# Altium PCB ART_CARD Rev 5.PcbDoc (part 1 of 13)
Units mil, origin at the board's own origin, x right, y up, seen from the top; angles counter-clockwise.
Board outline 6600.39 x 3903.54 mil, 8 copper layers (Top, Inner Layer 2, Inner Layer 3, Inner Layer 4, Inner Layer 5, Inner Layer 6, Inner Layer 7, Bottom), stack 63.111 mil thick; 542 components, 382 nets, 2410 pads, 1433 vias.
Unrouted connection lines stored in the file: 1247.
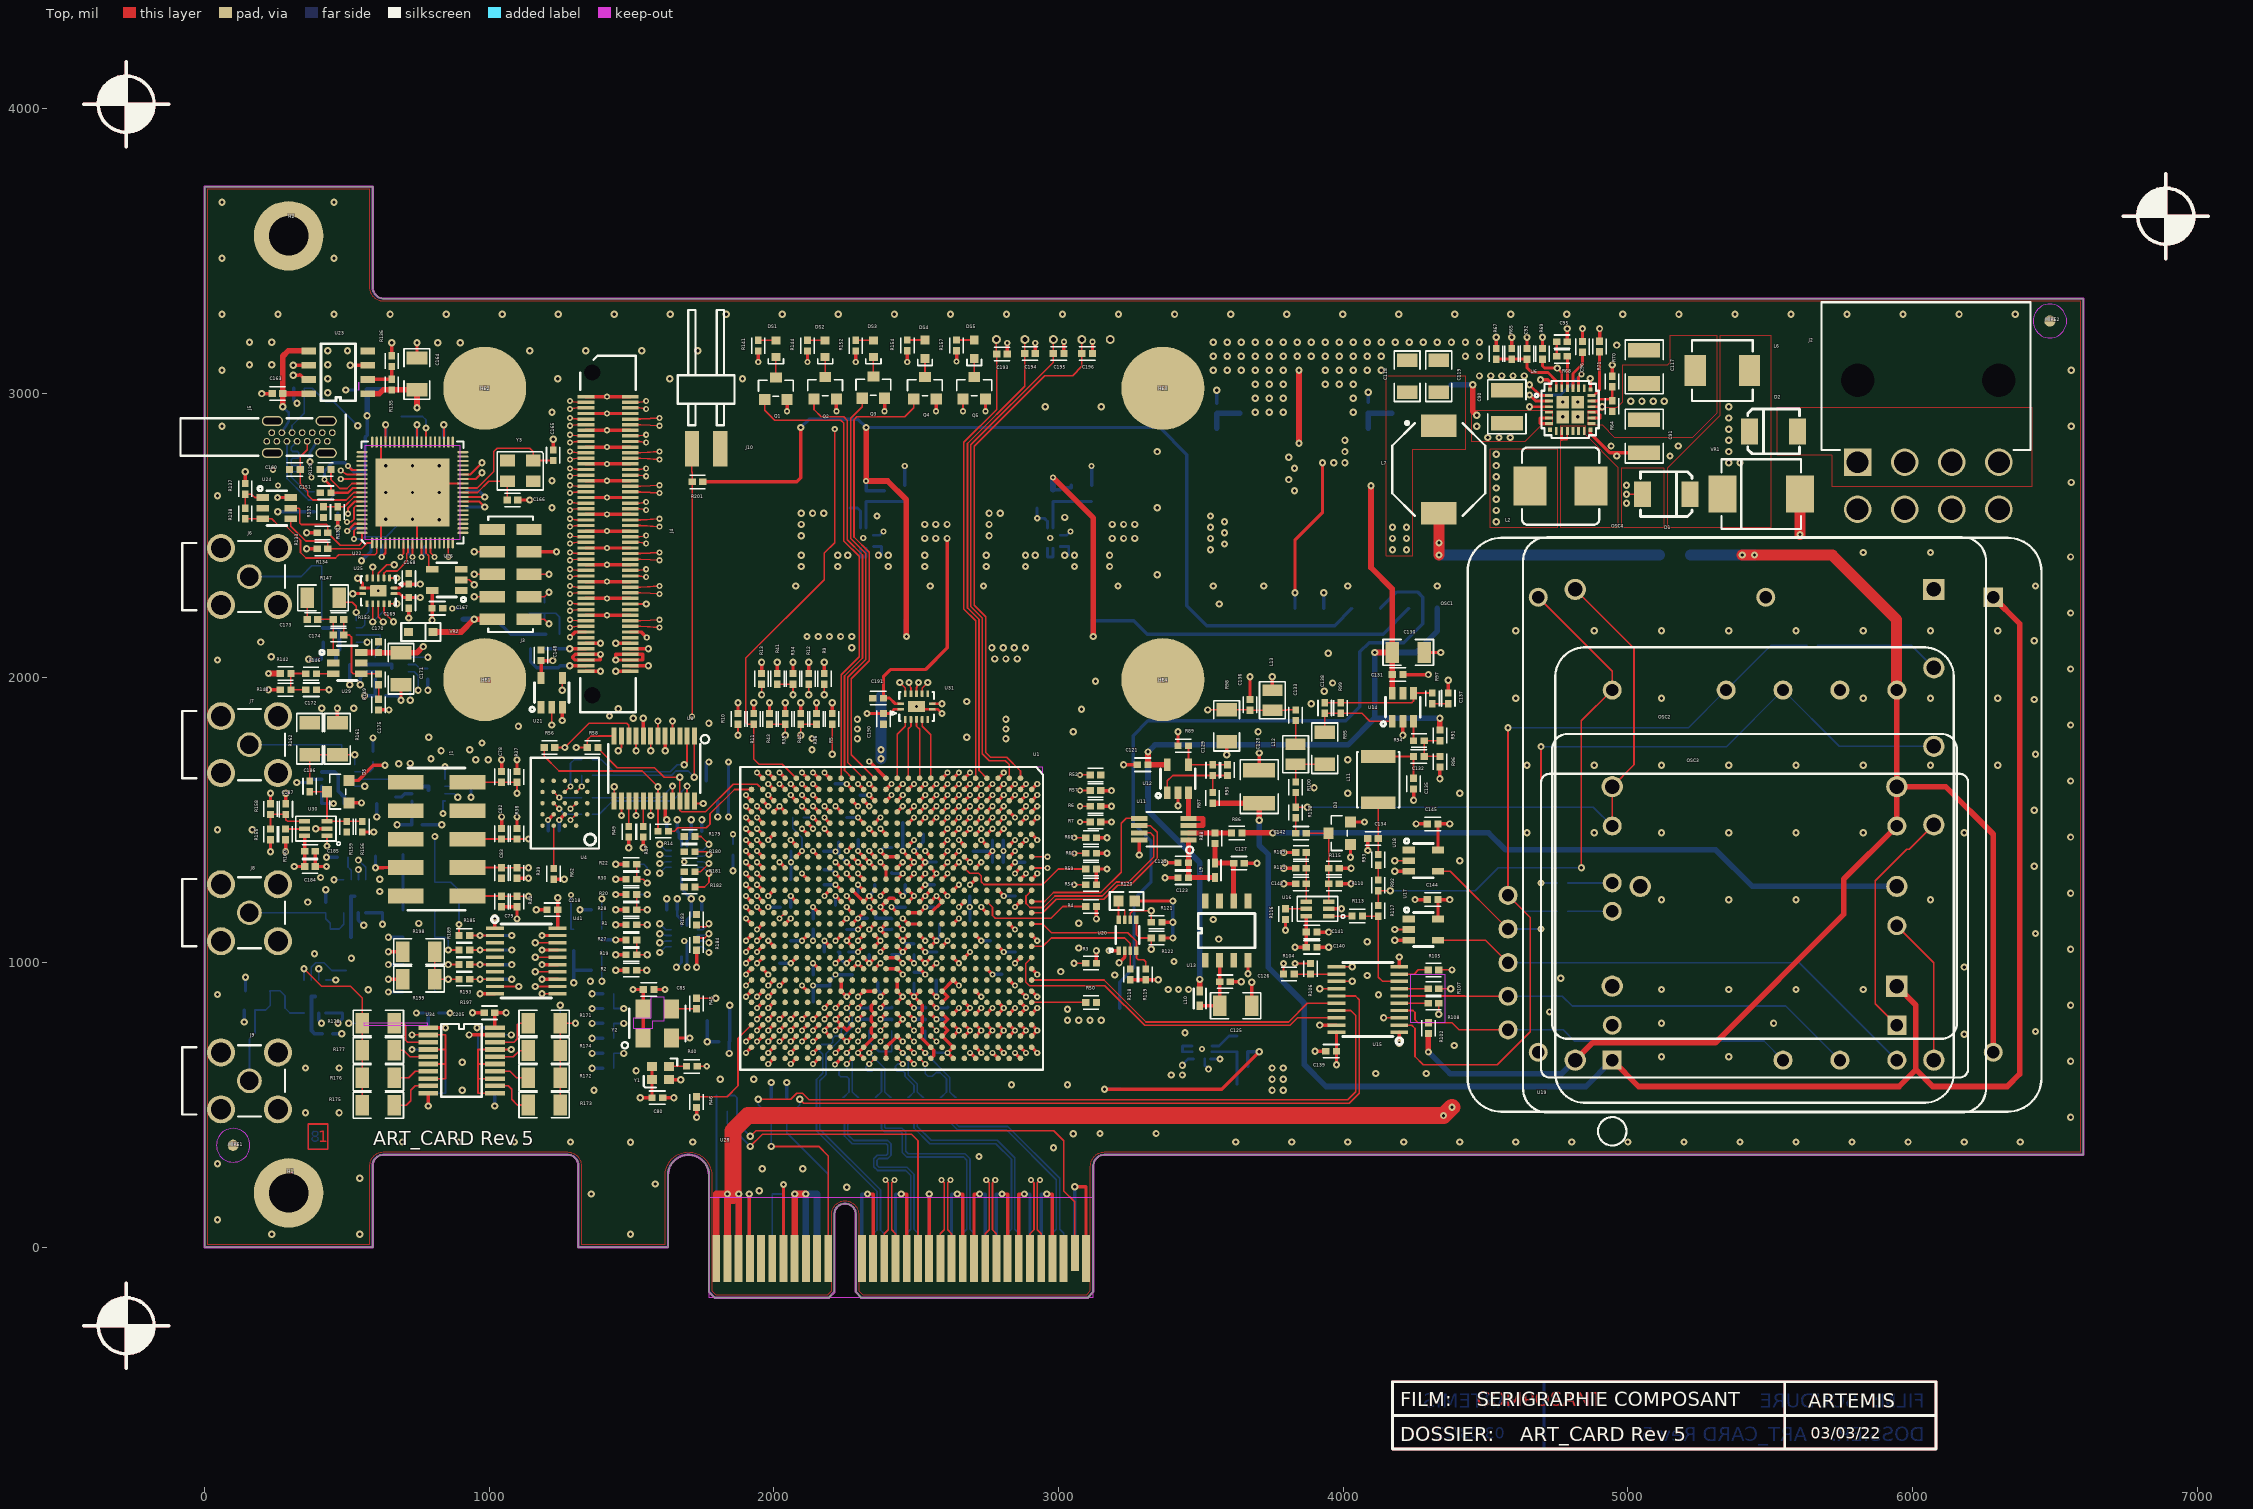
[diagram p0: Top view]
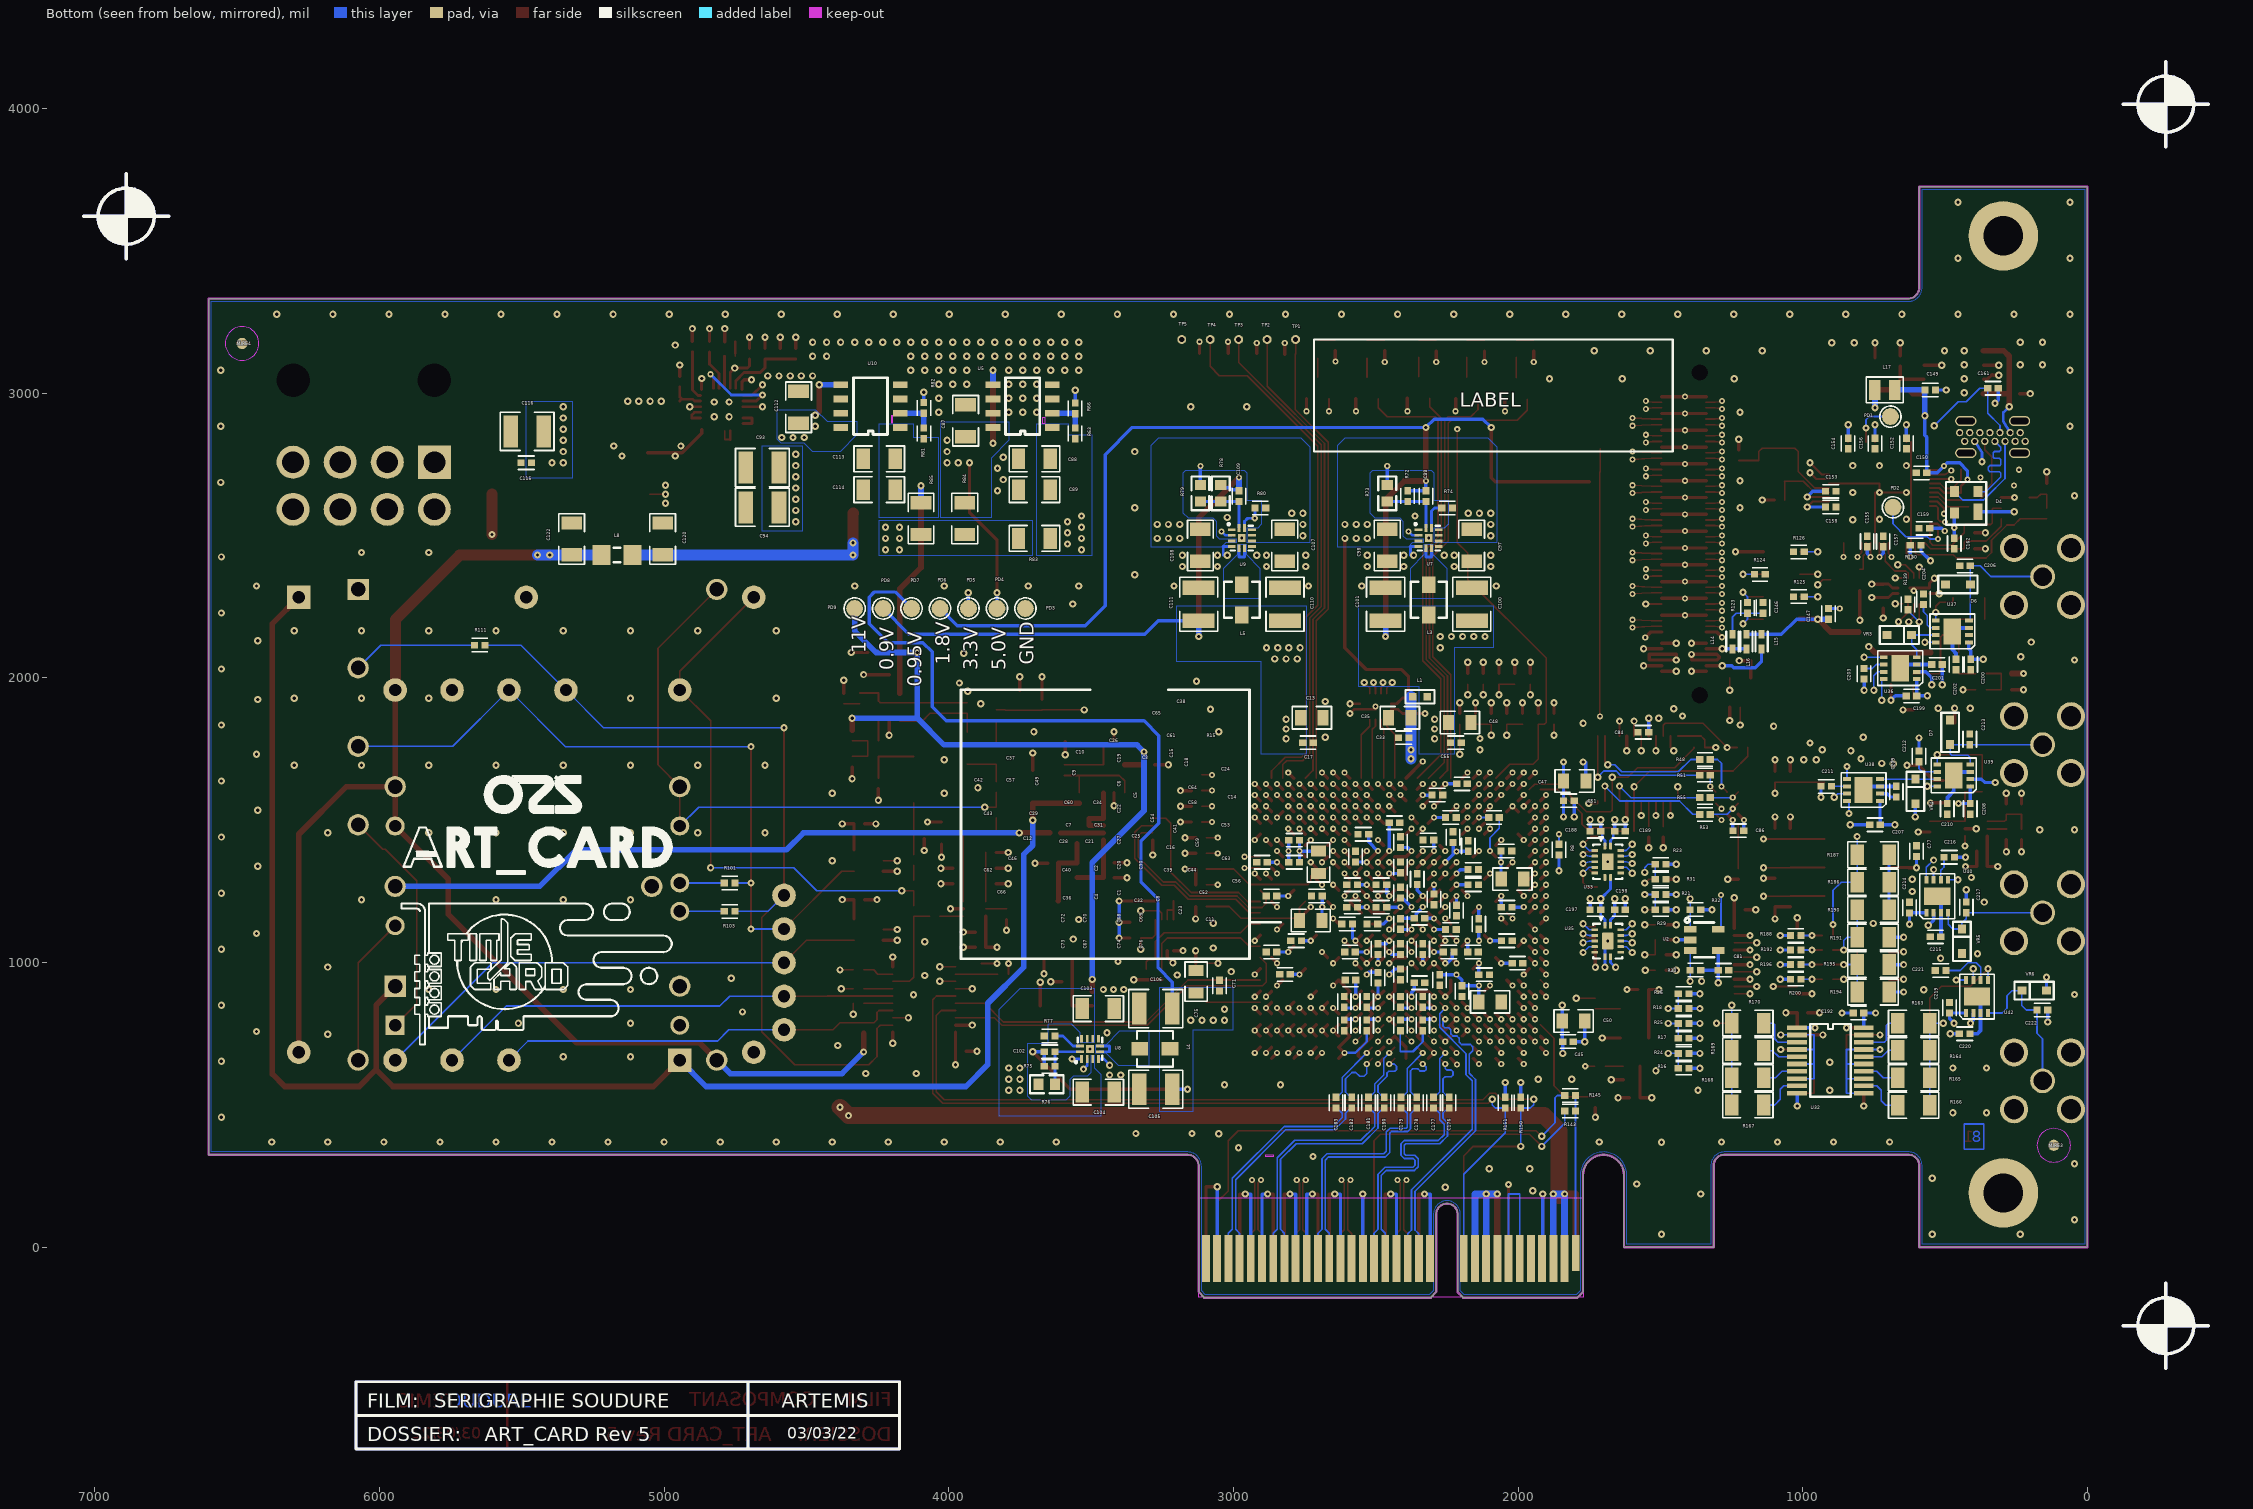
[diagram p1: Bottom view, seen from below]
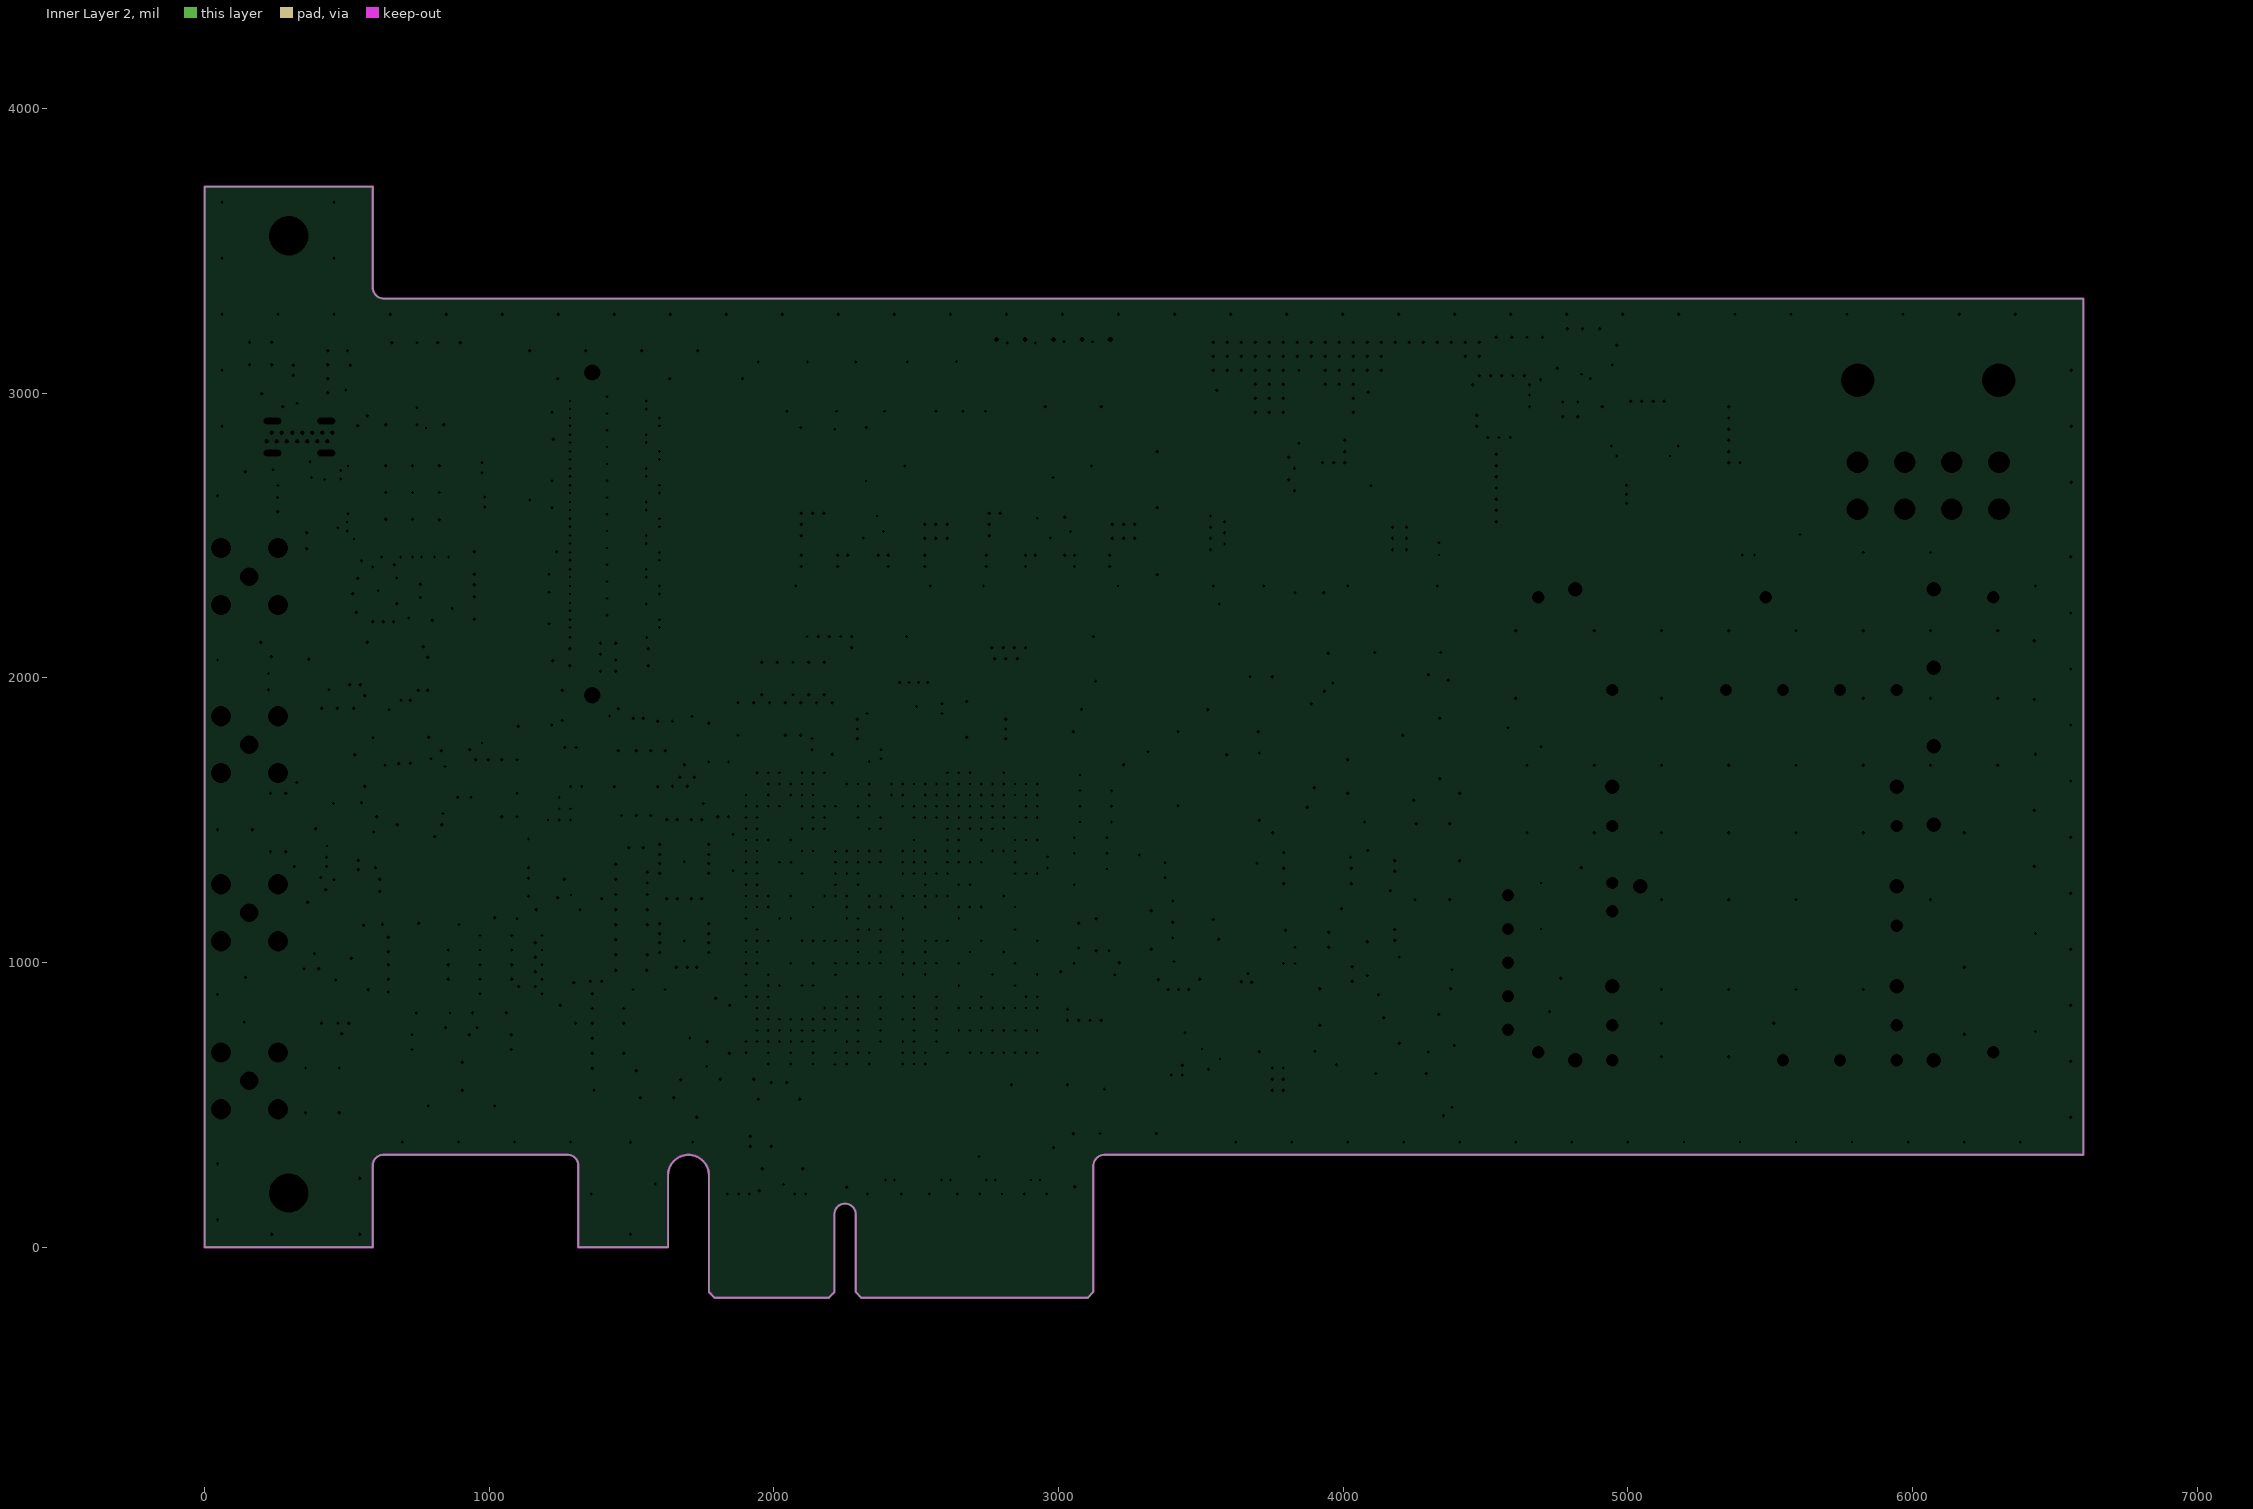
[diagram p2: Inner Layer 2, clearances drawn from the general rule]
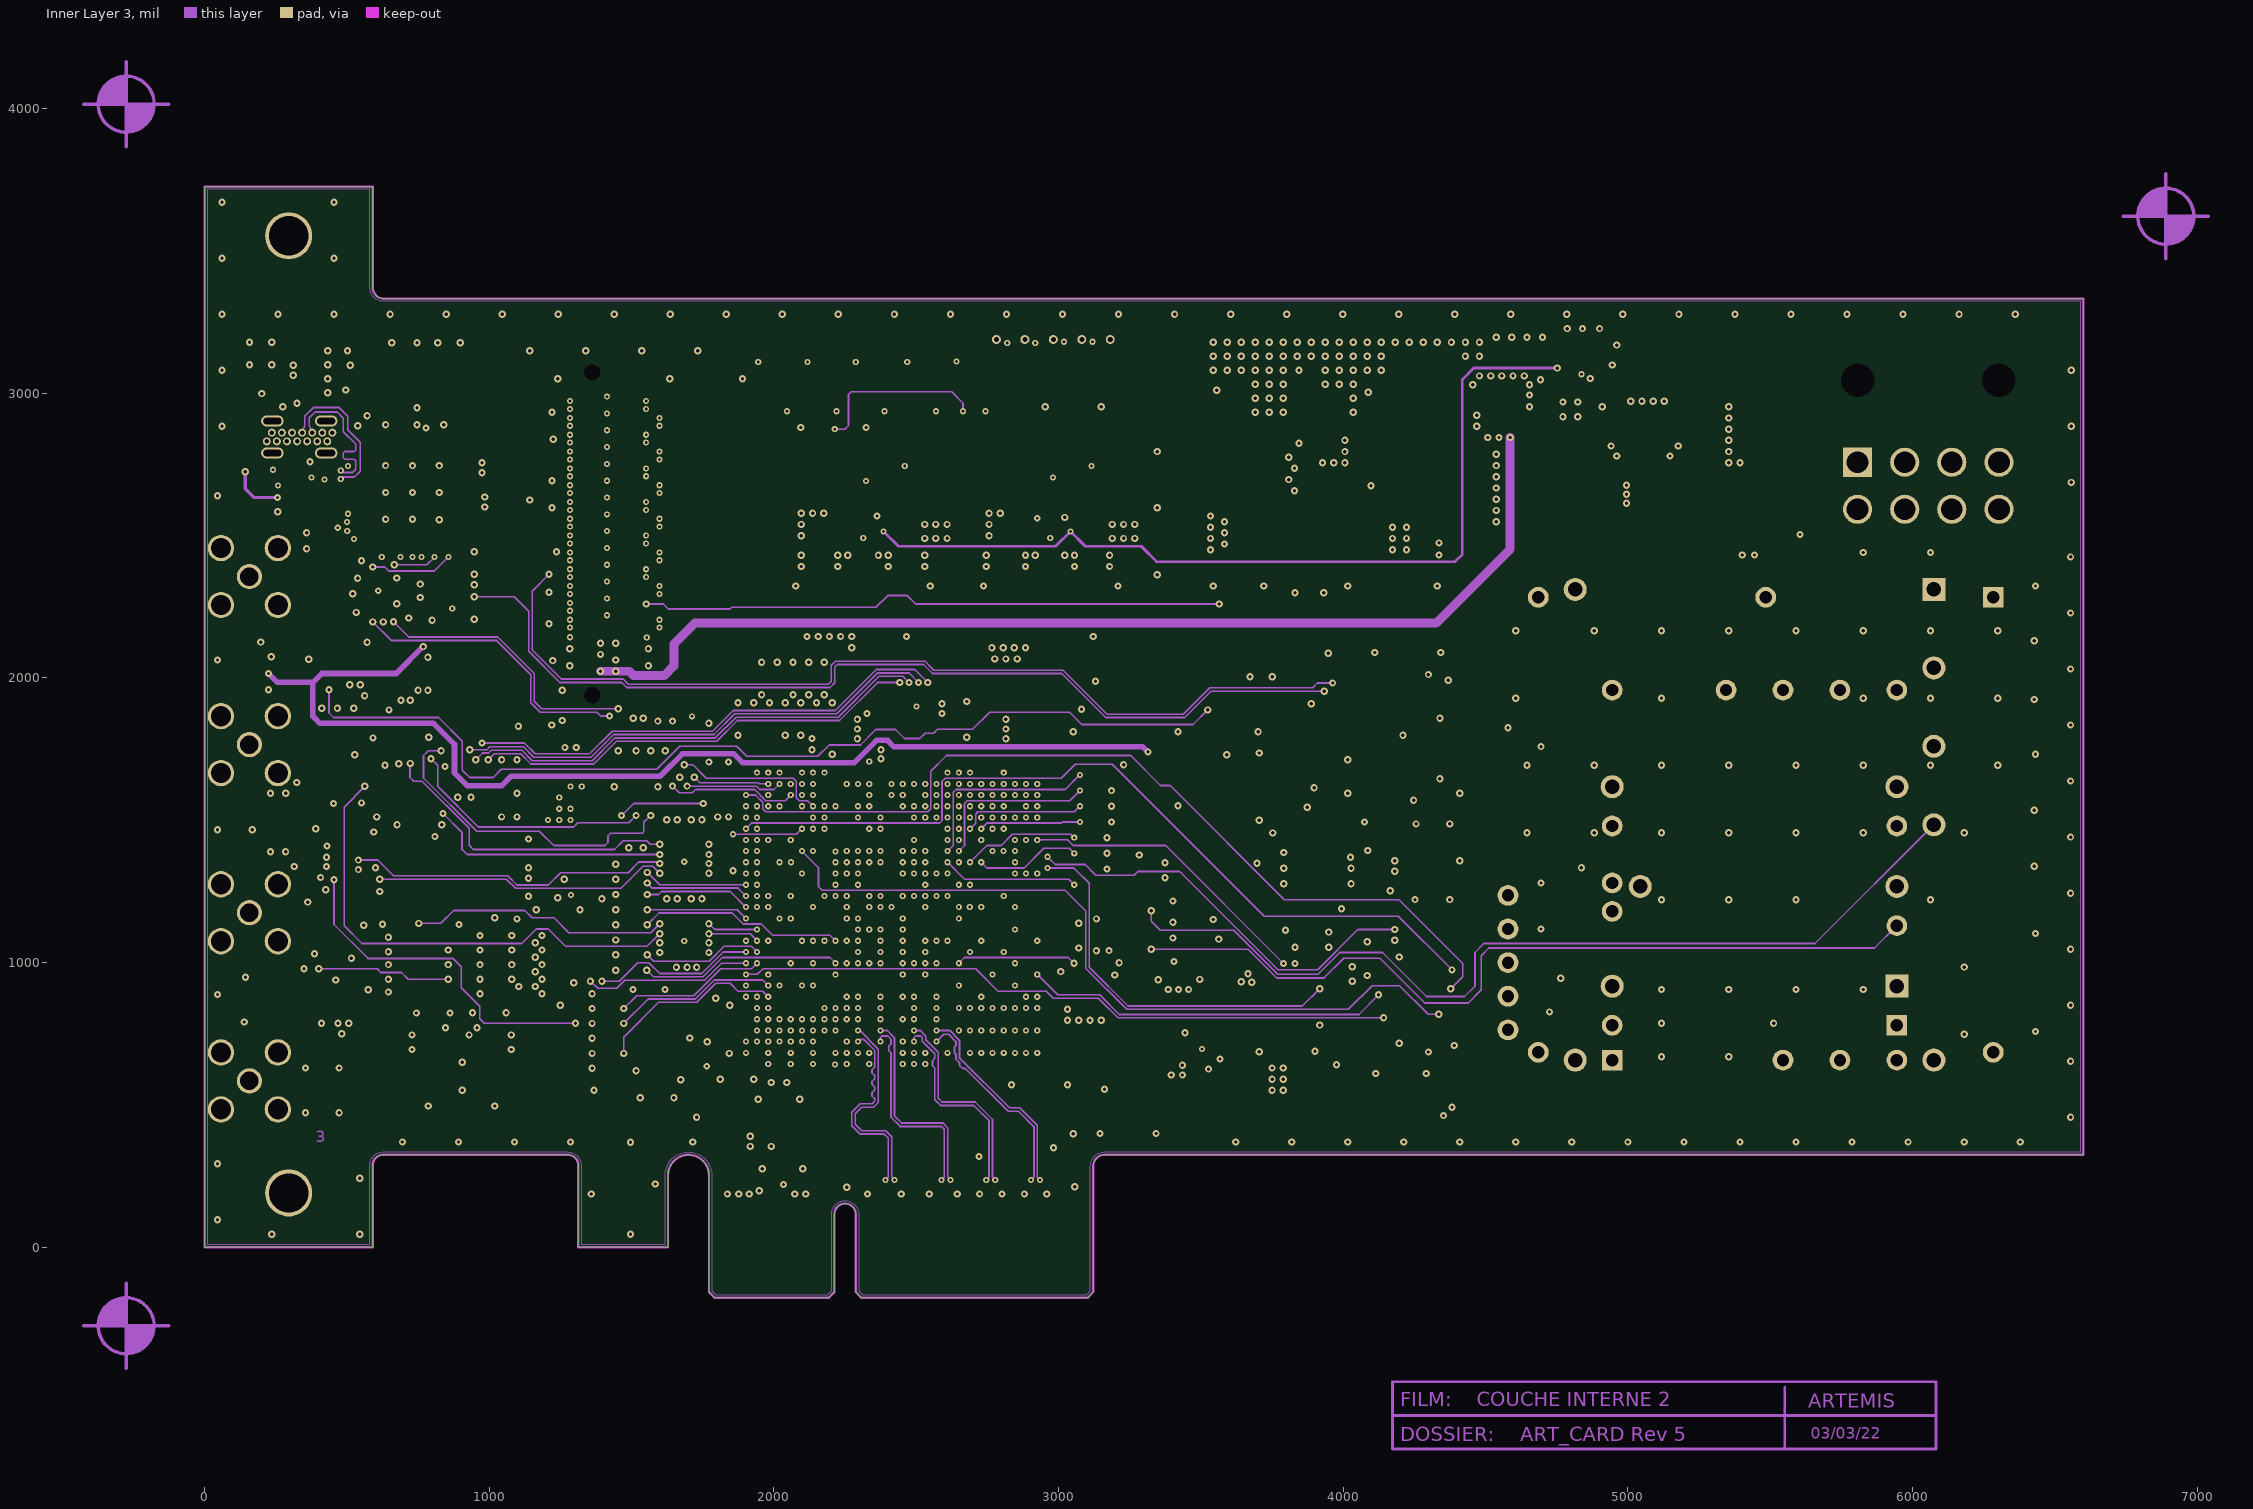
[diagram p3: Inner Layer 3]
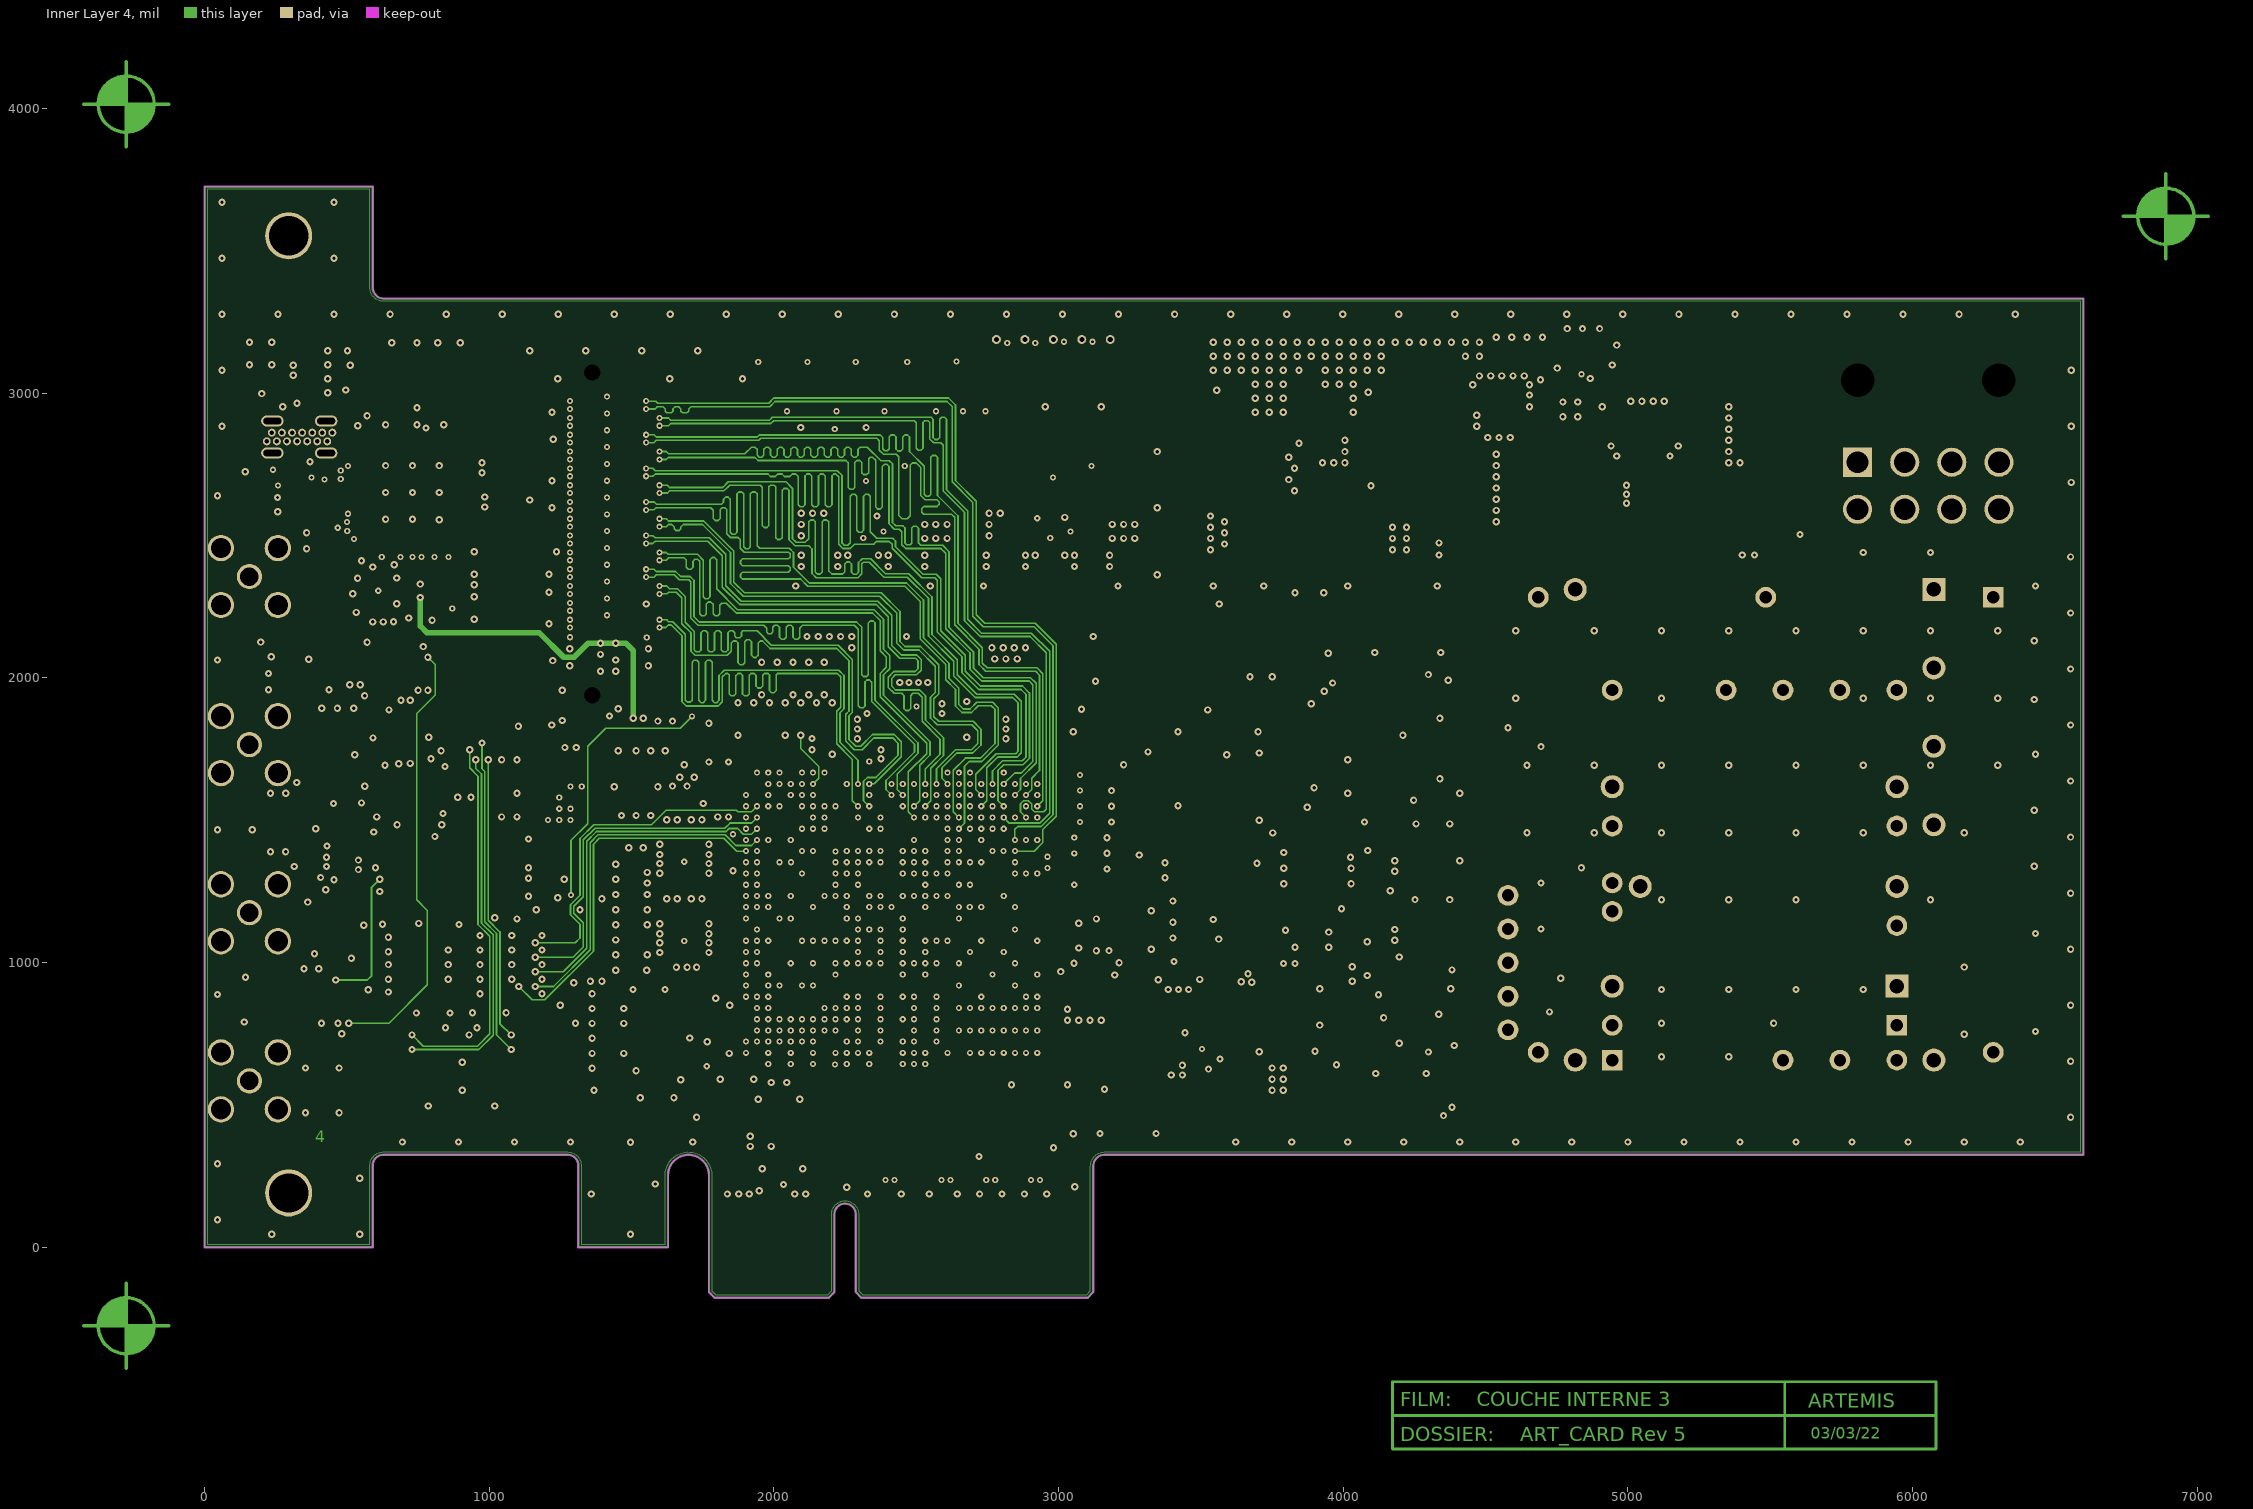
[diagram p4: Inner Layer 4]
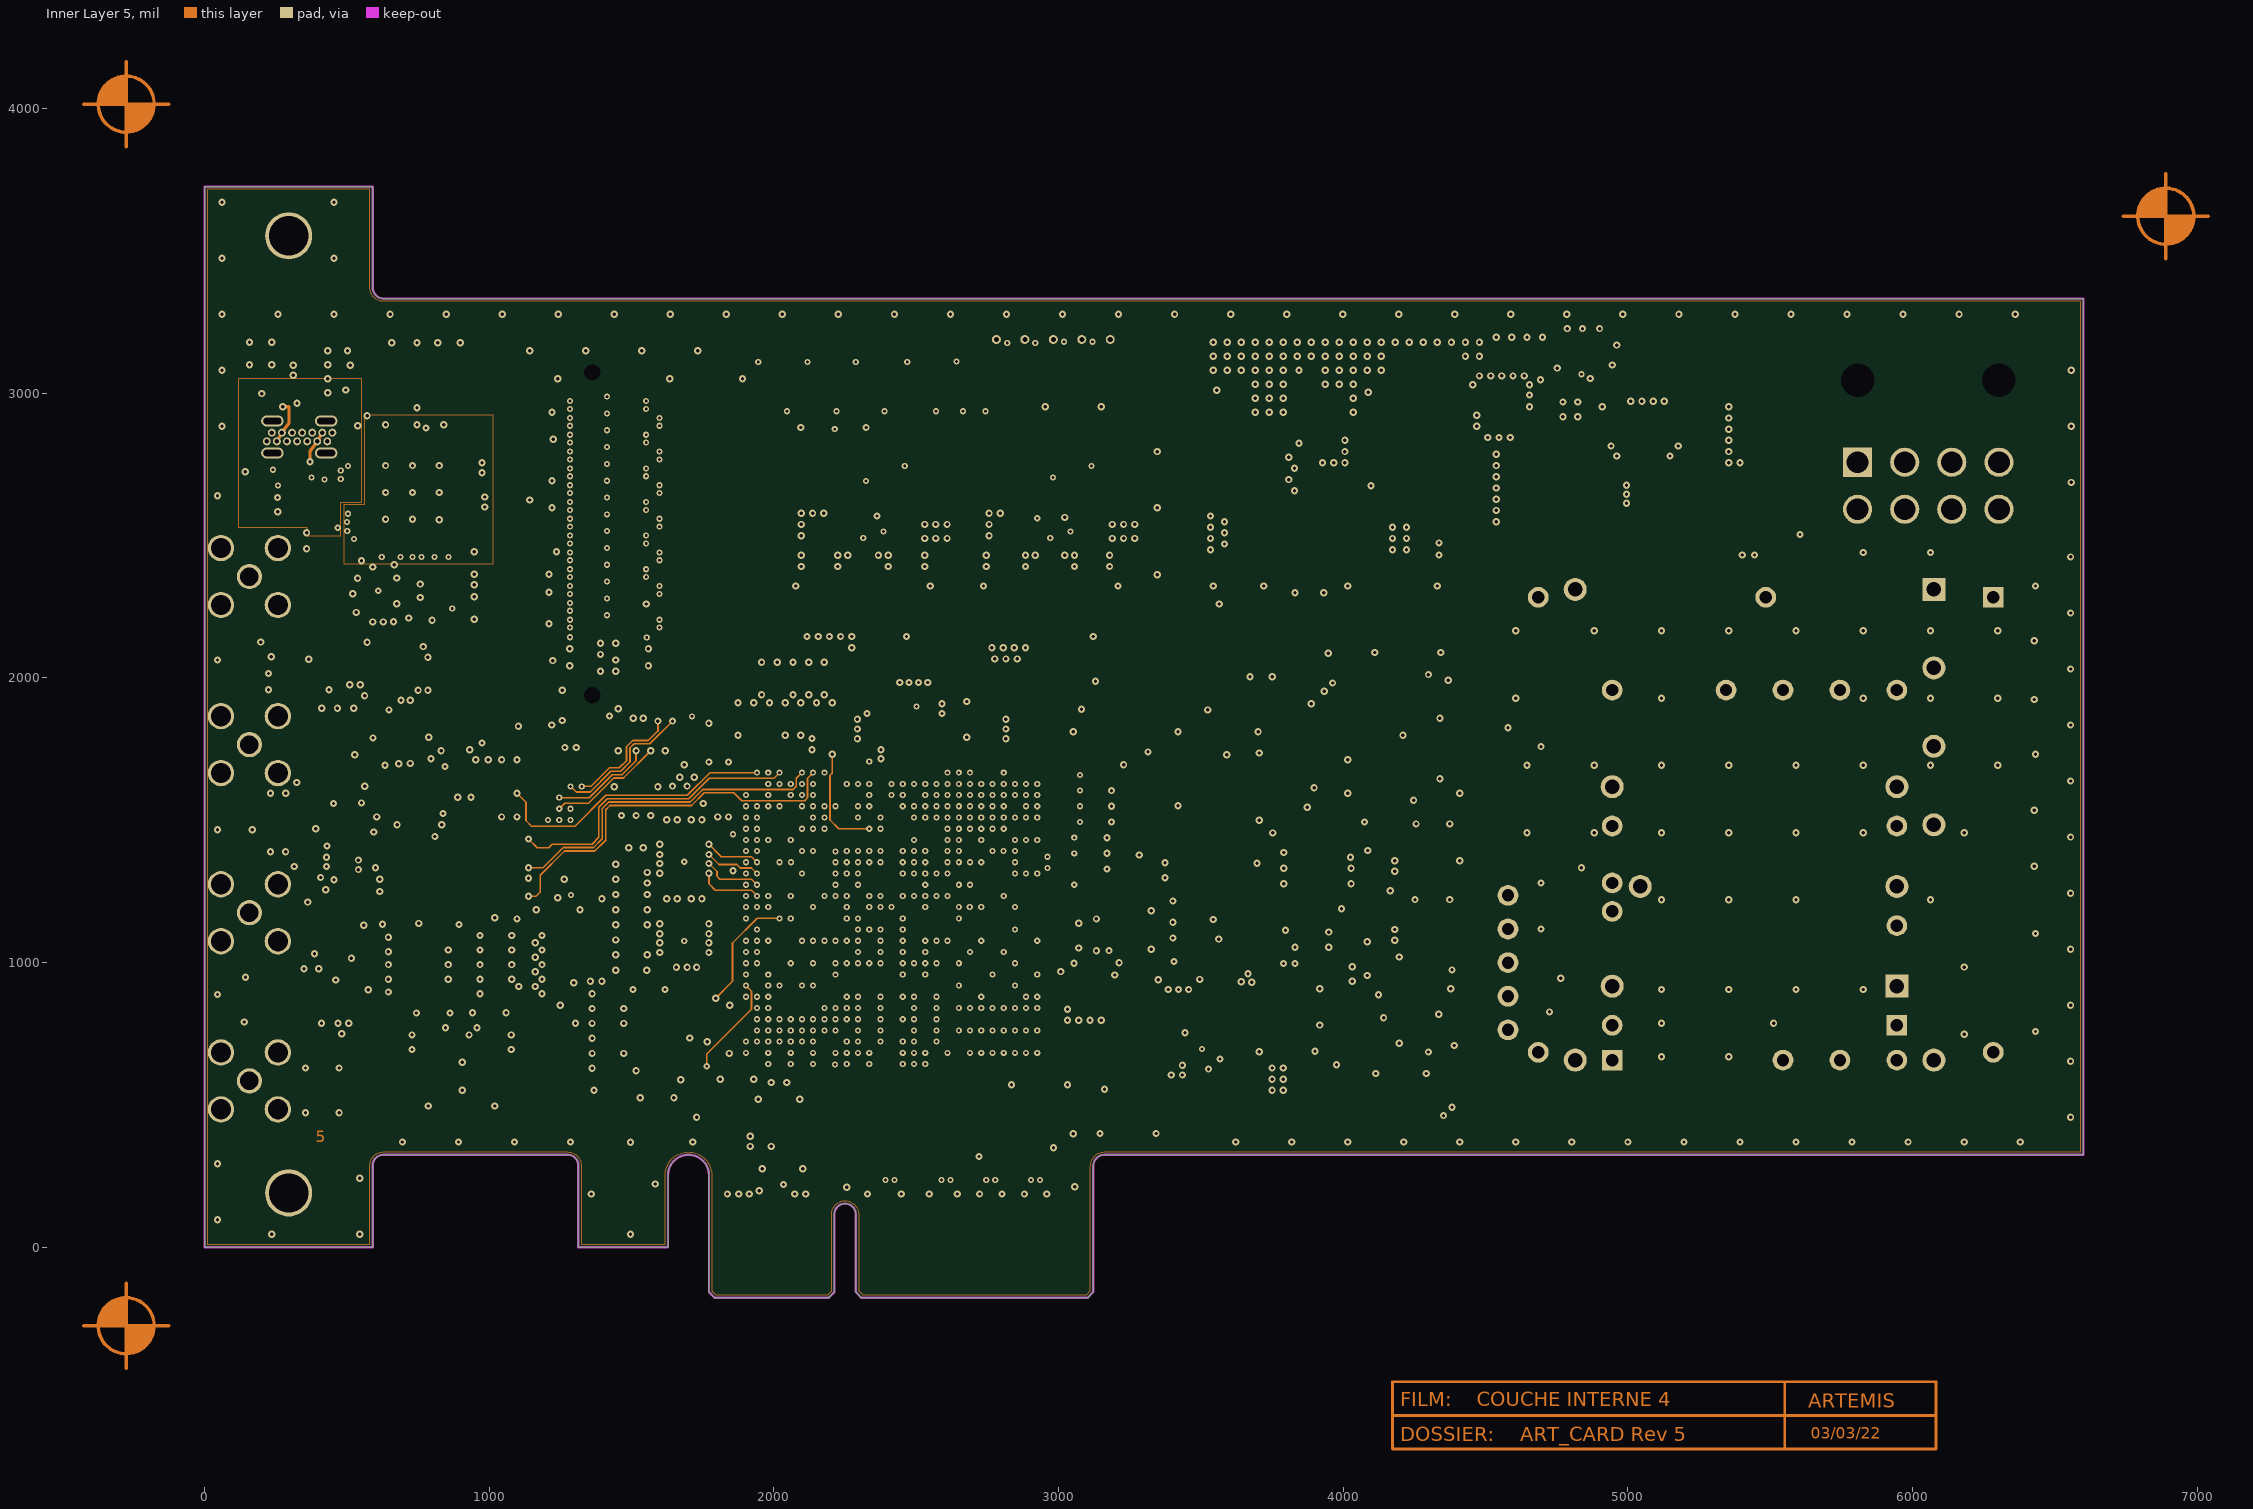
[diagram p5: Inner Layer 5]
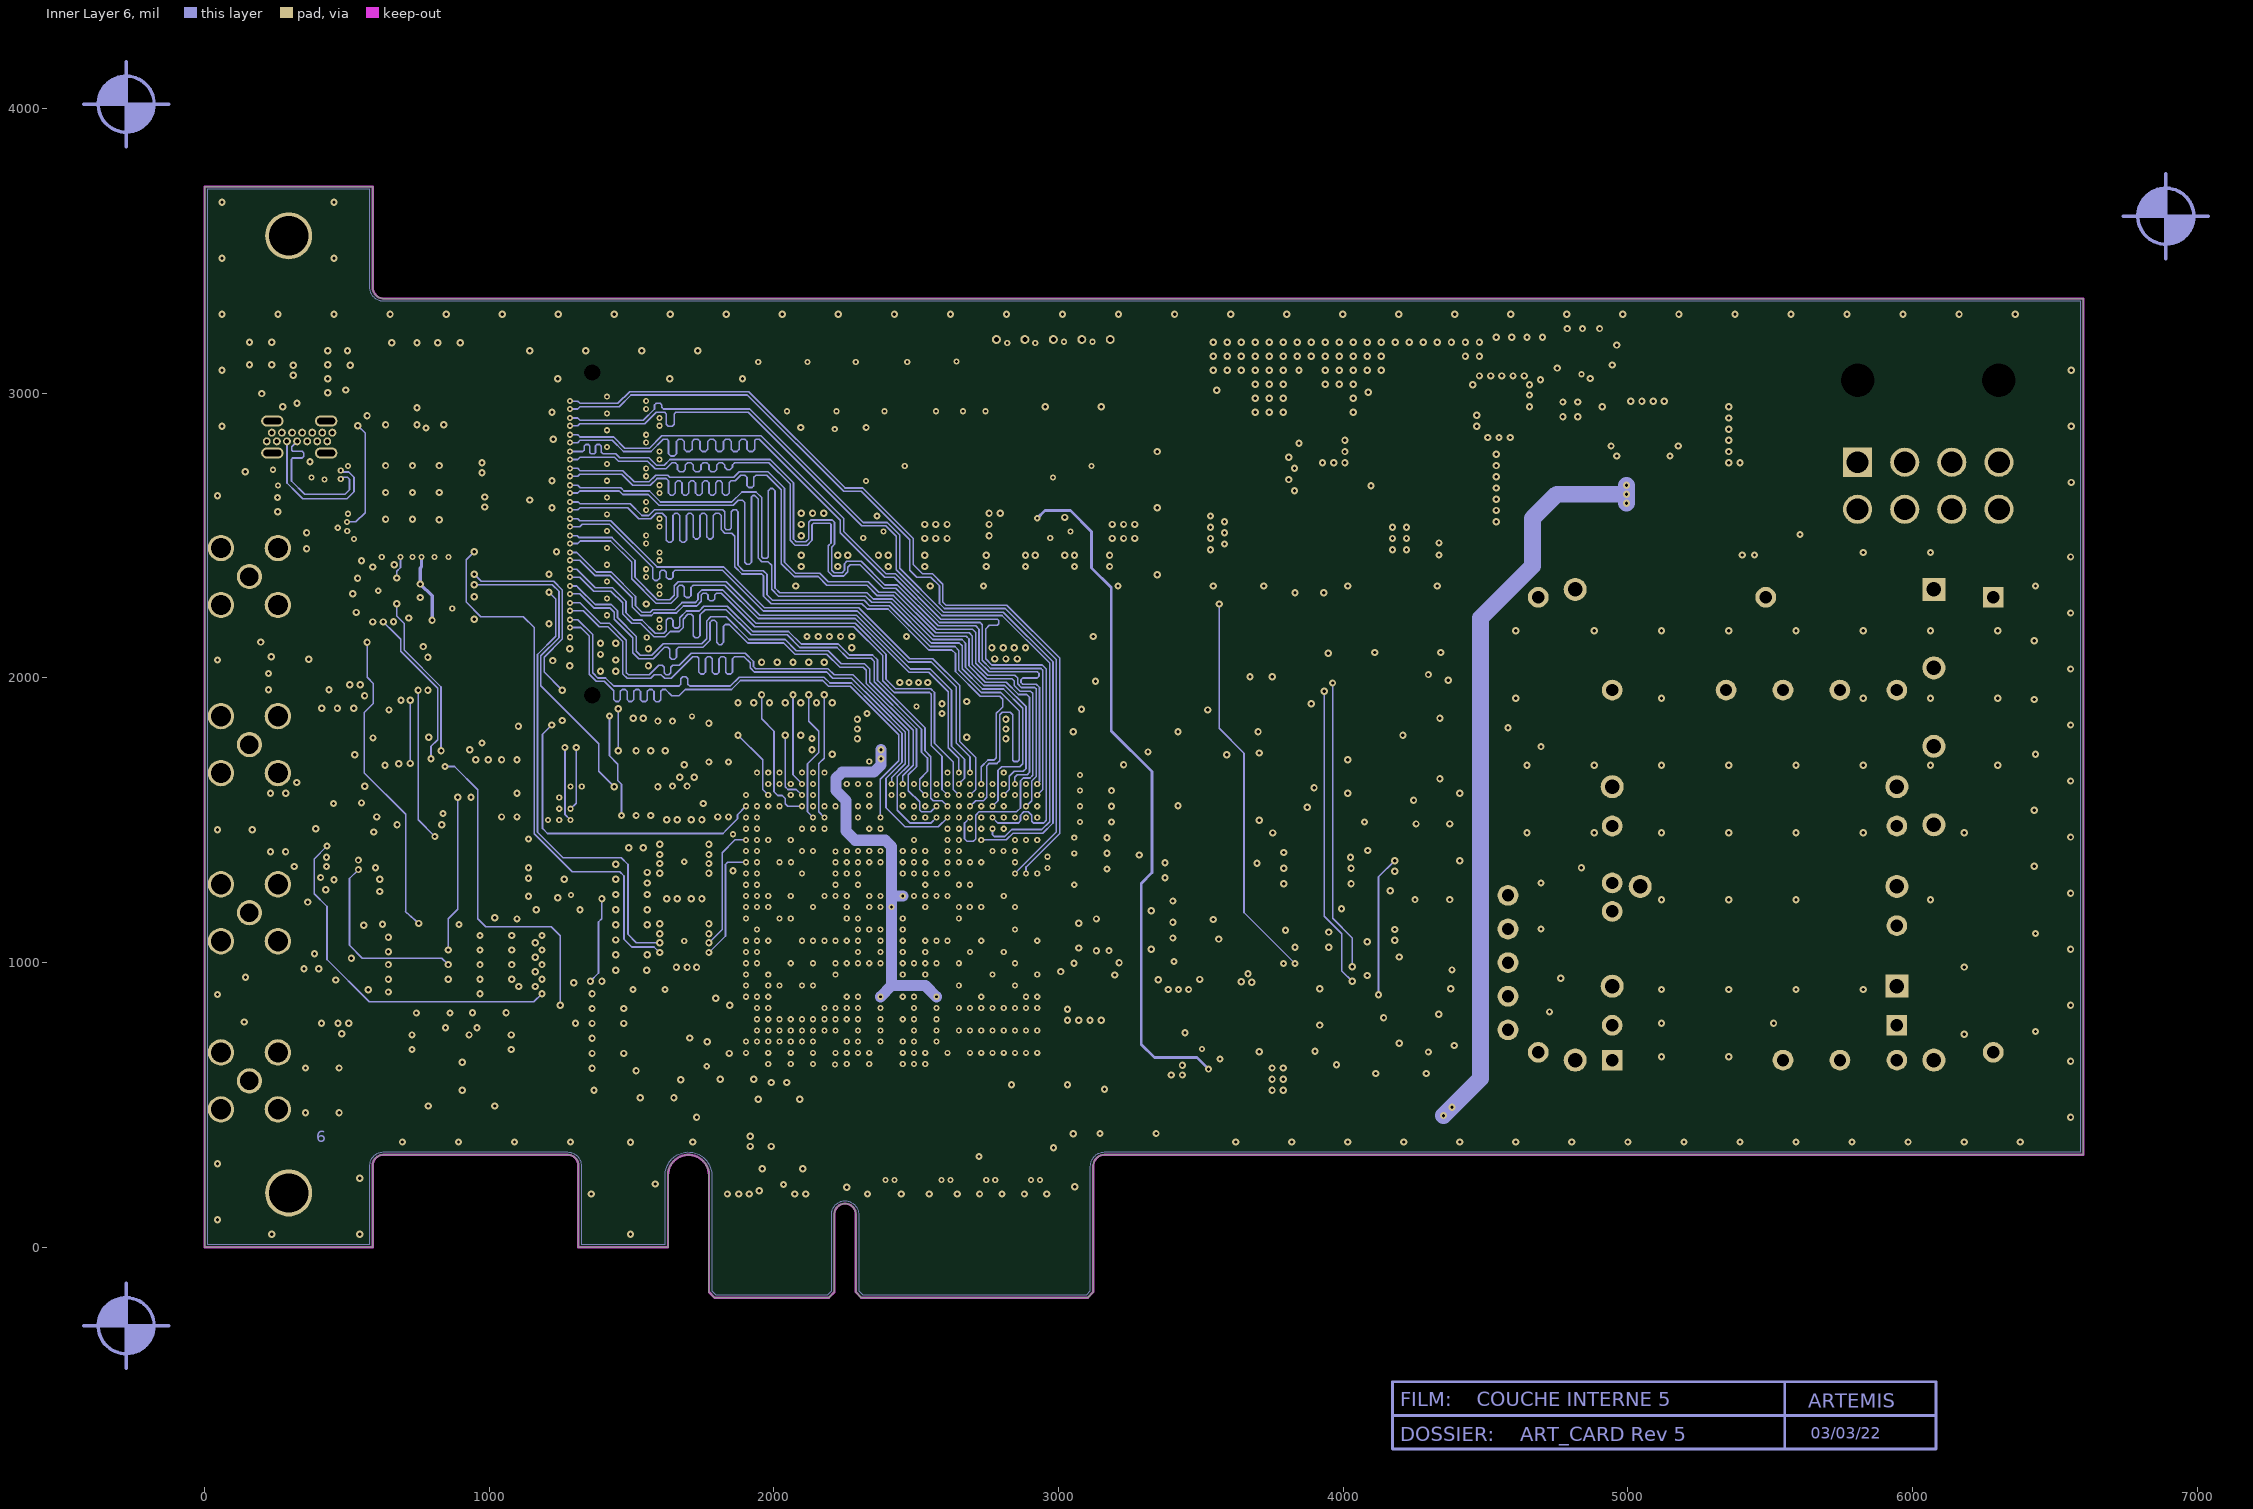
[diagram p6: Inner Layer 6]
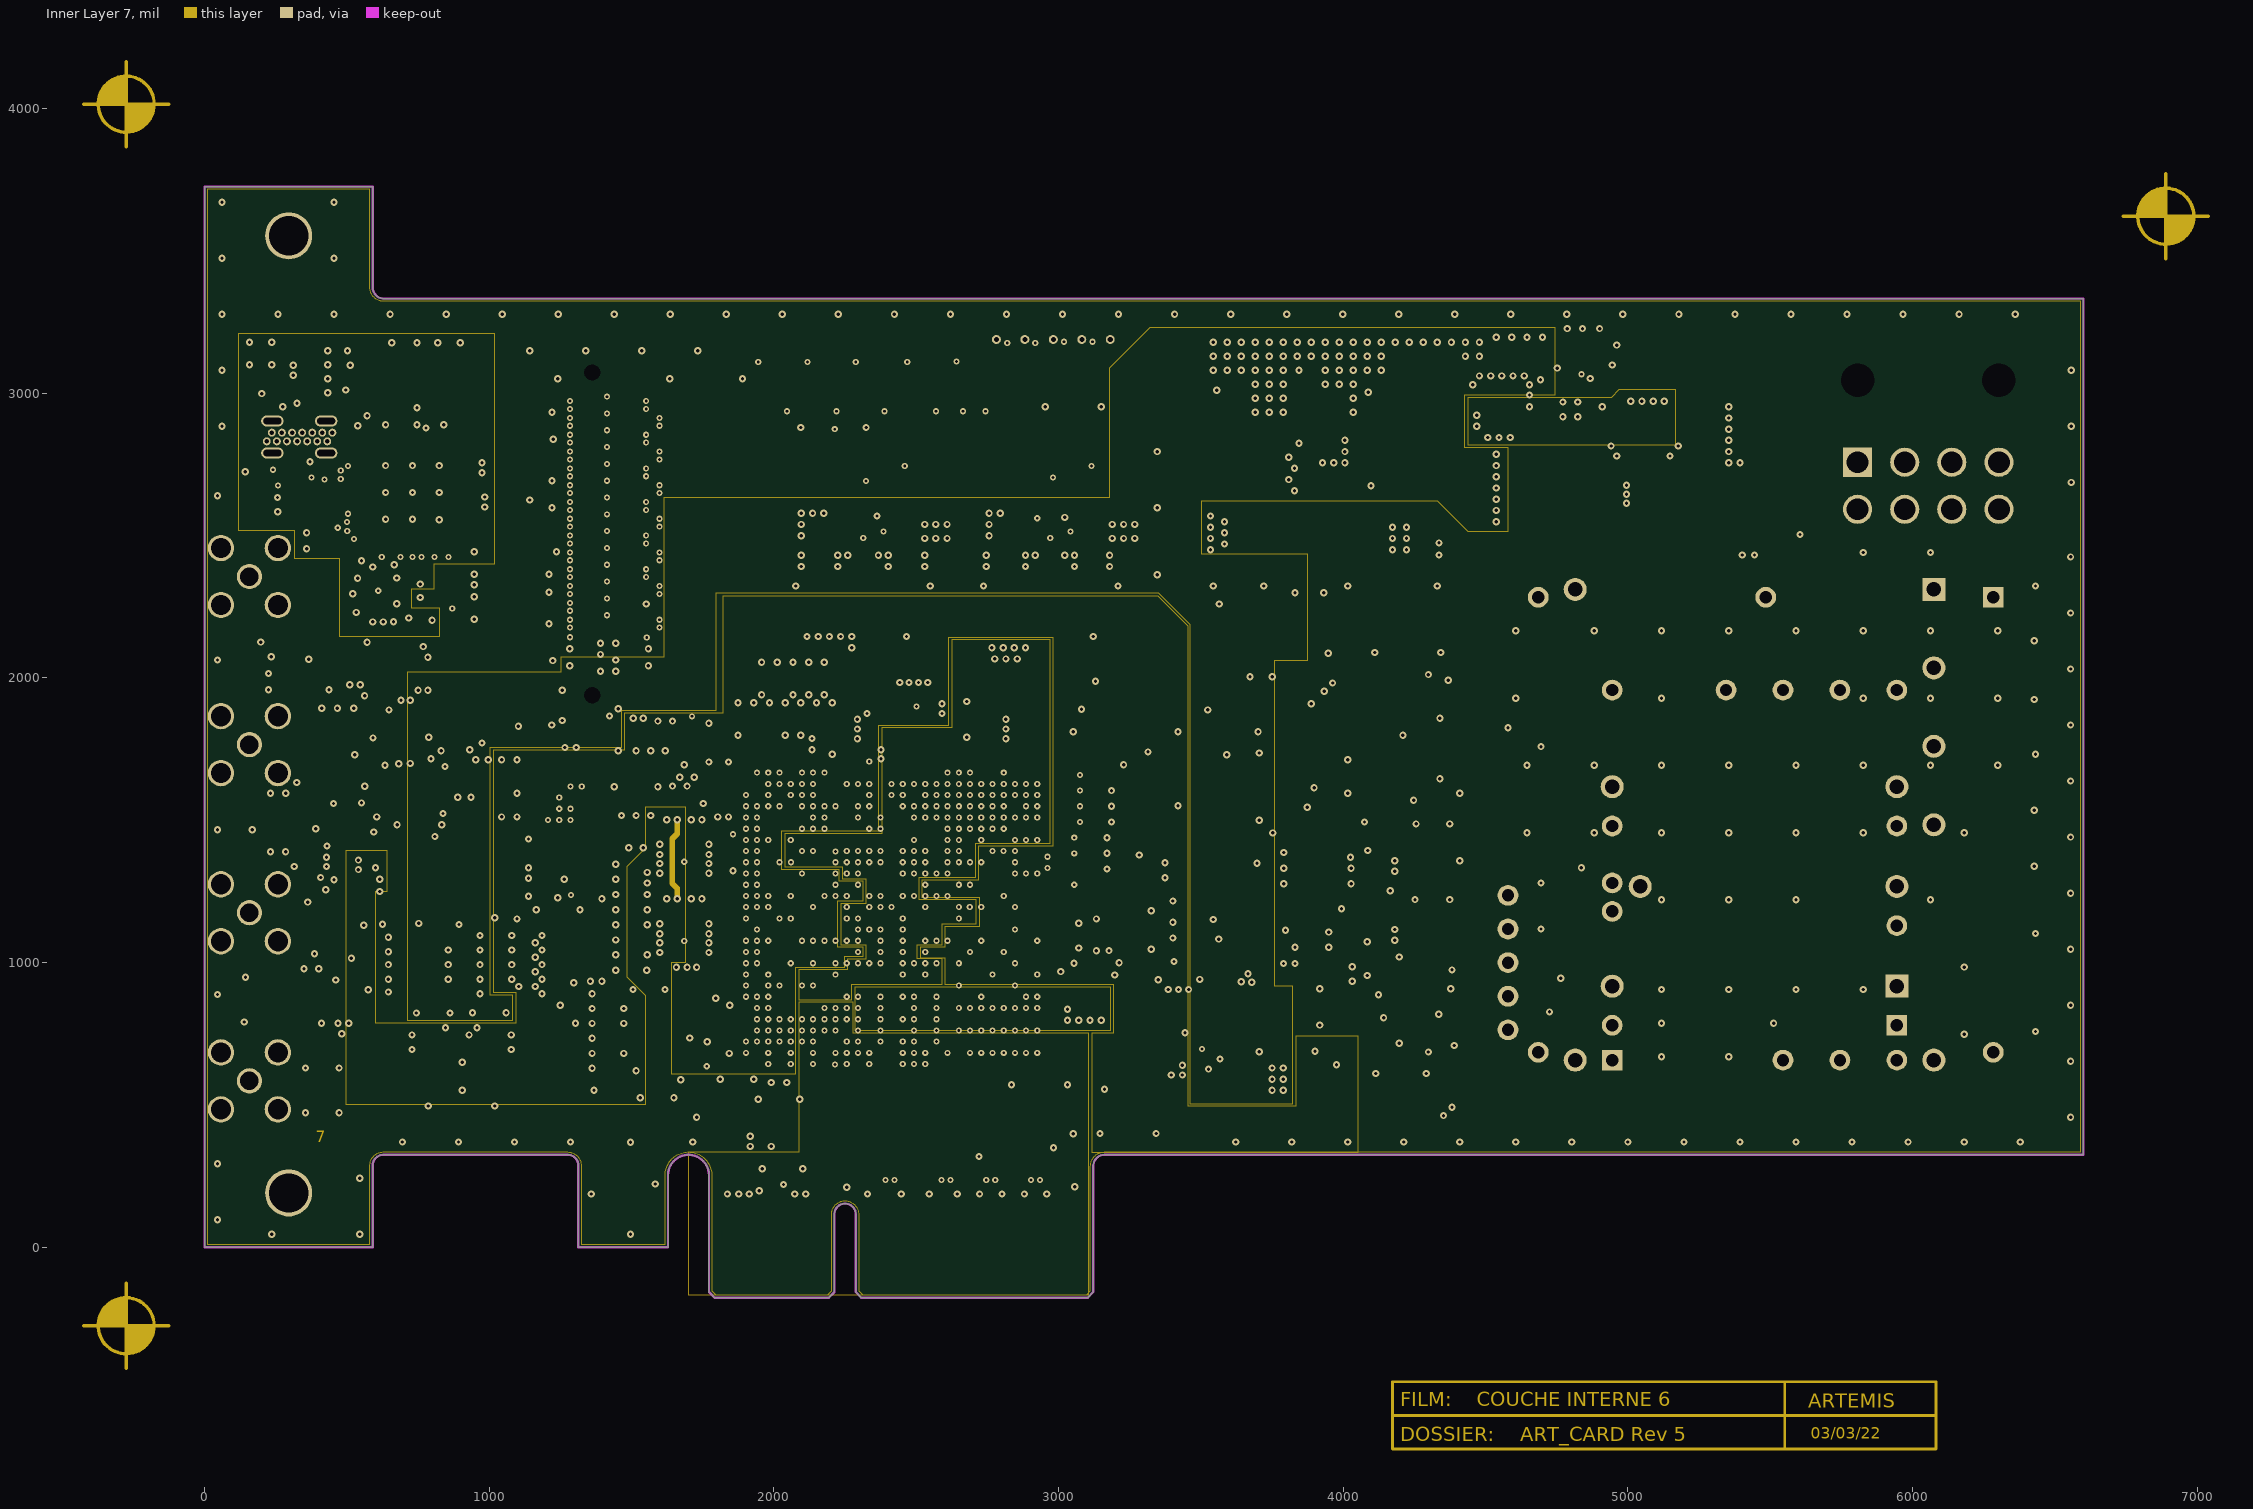
[diagram p7: Inner Layer 7]

## Layer stack, top to bottom
Solder Mask Top: solder mask 0.4, Solder Resist, Dk 3.5
Top: signal copper 1.378
Dielectric 1: dielectric 7.874, FR-4, Dk 4.3
Inner Layer 2: plane copper 0.7087
Dielectric2: dielectric 7.874, FR-4, Dk 4.3
Inner Layer 3: signal copper 0.7087
Dielectric3: dielectric 7.874, FR-4, Dk 4.3
Inner Layer 4: signal copper 0.7087
Dielectric4: dielectric 8.8583, FR-4, Dk 4.3
Inner Layer 5: signal copper 0.7087
Dielectric5: dielectric 7.874, FR-4, Dk 4.3
Inner Layer 6: signal copper 0.7087
Dielectric6: dielectric 7.874, FR-4, Dk 4.3
Inner Layer 7: signal copper 0.7087
Dielectric7: dielectric 7.874, FR-4, Dk 4.3
Bottom: signal copper 1.378
Solder Mask Bottom: solder mask 0.4, Solder Resist, Dk 3.5

## Board outline
0,0 0,3726.38 590.55,3726.38 590.55,3372.05 ccw(c629.92,3372.05) 629.92,3332.68 6600.39,3332.68 6600.39,324.8 3161.42,324.8 ccw(c3161.42,285.43) 3122.05,285.43 3122.05,-157.48 3102.36,-177.17 2307.09,-177.17 2287.4,-157.48 2287.4,116.14 ccw(c2250,116.14) 2212.6,116.14 2212.6,-157.48 2192.91,-177.17 1791.34,-177.17 1771.65,-157.48 1771.65,253.94 1771.65,253.96 ccw(c1699.8,252.95) 1627.95,253.94 1627.95,0 1312.99,0 1312.99,287.4 ccw(c1275.59,287.4) 1275.59,324.8 627.95,324.8 ccw(c627.95,287.4) 590.55,287.4 590.55,0

## Design rules (kind name [scope] priority, off if disabled: settings)
Clearance "Clearance - Net - GND - 50OHMS" [InNet('GND') vs InNetClass('50OHMS')] p1: gap=17.72 ignorepadtopadclearanceinfootprint=FALSE except(0: Arc-Hole Track-Hole SMDPad-Hole THPad-Hole Via-Hole Fill-Hole Poly-Hole Region-Hole Text-Hole; 5.91: Arc-Arc Arc-Track Arc-SMDPad Arc-THPad Arc-Via Track-Track Track-SMDPad Track-THPad Track-Via SMDPad-SMDPad SMDPad-THPad SMDPad-Via THPad-THPad THPad-Via Via-Via; 10: Arc-Text Track-Text SMDPad-Text THPad-Text Via-Text Fill-Text Poly-Text Region-Text Text-Text)
Clearance "Clearance - Net - 12.0V" [InNet('12.0V') OR InNet('F_1.8V')] p2: gap=5.91 ignorepadtopadclearanceinfootprint=FALSE except(0: Arc-Hole Track-Hole SMDPad-Hole THPad-Hole Via-Hole Fill-Hole Poly-Hole Region-Hole Text-Hole; 8.27: Arc-Fill Arc-Poly Arc-Region Track-Fill Track-Poly Track-Region SMDPad-Fill SMDPad-Poly SMDPad-Region THPad-Fill THPad-Poly THPad-Region Via-Fill Via-Poly Via-Region Fill-Fill Fill-Poly Fill-Region Poly-Poly Poly-Region Region-Region; 10: Text-Text)
Clearance "Clearance - Net - 3.3V" [InNet('3.3V') OR InNet('5V')] p3: gap=5.91 ignorepadtopadclearanceinfootprint=FALSE except(0: Arc-Hole Track-Hole SMDPad-Hole THPad-Hole Via-Hole Fill-Hole Poly-Hole Region-Hole Text-Hole; 8.27: Arc-Fill Arc-Poly Arc-Region Track-Fill Track-Poly Track-Region SMDPad-Fill SMDPad-Poly SMDPad-Region THPad-Fill THPad-Poly THPad-Region Via-Fill Via-Poly Via-Region; 9.84: Fill-Fill Fill-Poly Fill-Region Poly-Poly Poly-Region Region-Region; 10: Text-Text)
Clearance "Clearance - Net - GND - 85OHMS" [InNet('GND') vs InNetClass('85OHMS')] p4: gap=17.72 ignorepadtopadclearanceinfootprint=FALSE except(0: Arc-Hole Track-Hole SMDPad-Hole THPad-Hole Via-Hole Fill-Hole Poly-Hole Region-Hole Text-Hole; 5.91: Arc-Arc Arc-Track Arc-SMDPad Arc-THPad Arc-Via Track-Track Track-SMDPad Track-THPad Track-Via SMDPad-SMDPad SMDPad-THPad SMDPad-Via THPad-THPad THPad-Via Via-Via; 10: Arc-Text Track-Text SMDPad-Text THPad-Text Via-Text Fill-Text Poly-Text Region-Text Text-Text)
Clearance "Clearance - Net - 0.9V" [InNet('0.9V') OR InNet('GND')] p5: gap=5.91 ignorepadtopadclearanceinfootprint=FALSE except(0: Arc-Hole Track-Hole SMDPad-Hole THPad-Hole Via-Hole Fill-Hole Poly-Hole Region-Hole Text-Hole; 8.27: Arc-Fill Arc-Poly Arc-Region Track-Fill Track-Poly Track-Region SMDPad-Fill SMDPad-Poly SMDPad-Region THPad-Fill THPad-Poly THPad-Region Fill-Fill Fill-Poly Fill-Region Poly-Poly Poly-Region Region-Region; 10: Text-Text)
Clearance "Clearance - Net - 0.95V" [InNet('0.95V') OR InNet('V_ASSERV') OR InNet('OSC_POWER')] p6: gap=5.91 ignorepadtopadclearanceinfootprint=FALSE except(0: Arc-Hole Track-Hole SMDPad-Hole THPad-Hole Via-Hole Fill-Hole Poly-Hole Region-Hole Text-Hole; 8.27: Arc-Fill Arc-Poly Arc-Region Track-Fill Track-Poly Track-Region SMDPad-Fill SMDPad-Poly SMDPad-Region THPad-Fill THPad-Poly THPad-Region Via-Fill Via-Poly Via-Region Fill-Fill Fill-Poly Fill-Region Poly-Poly Poly-Region Region-Region; 10: Text-Text)
Clearance "Clearance - NetClass - ClearanceClass_7(RuleSet)" [InNetClass('ClearanceClass_7(RuleSet)')] p7: gap=5.91 ignorepadtopadclearanceinfootprint=FALSE except(0: Arc-Hole Track-Hole SMDPad-Hole THPad-Hole Via-Hole Fill-Hole Poly-Hole Region-Hole Text-Hole; 8.27: Arc-Fill Arc-Poly Arc-Region Track-Fill Track-Poly Track-Region SMDPad-Fill SMDPad-Poly SMDPad-Region THPad-Fill THPad-Poly THPad-Region Via-Fill Via-Poly Via-Region Fill-Fill Fill-Poly Fill-Region Poly-Poly Poly-Region Region-Region; 10: Text-Text)
Clearance "Clearance - NetClass - 85OHMS" [InNetClass('85OHMS')] p8: gap=5.91 ignorepadtopadclearanceinfootprint=FALSE except(0: Arc-Hole Track-Hole SMDPad-Hole THPad-Hole Via-Hole Fill-Hole Poly-Hole Region-Hole Text-Hole; 8.27: Arc-Fill Arc-Poly Arc-Region Track-Fill Track-Poly Track-Region SMDPad-Fill SMDPad-Poly SMDPad-Region THPad-Fill THPad-Poly THPad-Region Via-Fill Via-Poly Via-Region; 9.84: Fill-Fill Fill-Poly Fill-Region Poly-Poly Poly-Region Region-Region; 10: Text-Text)
Clearance "Clearance - Default - DEFAULT - Via" [IsVia vs IsVia] p9: gap=5.91 ignorepadtopadclearanceinfootprint=FALSE
Clearance "Clearance - Default - DEFAULT- SMD" [IsVia vs IsSMTPin] p10: gap=5.91 ignorepadtopadclearanceinfootprint=FALSE
Clearance "Clearance - Default - DEFAULT - Net" [All] p11: gap=5.91 ignorepadtopadclearanceinfootprint=FALSE except(0: Arc-Hole Track-Hole SMDPad-Hole THPad-Hole Via-Hole Fill-Hole Poly-Hole Region-Hole Text-Hole; 8.27: Arc-Fill Arc-Poly Arc-Region Track-Fill Track-Poly Track-Region SMDPad-Fill SMDPad-Poly SMDPad-Region THPad-Fill THPad-Poly THPad-Region; 9.84: Fill-Fill Fill-Poly Fill-Region Poly-Poly Poly-Region Region-Region; 10: Text-Text)
ComponentClearance "ComponentClearance - Default - DEFAULT" [All] p1: gap=1.97 collisioncheckmode=3 verticalgap=10 showdistances=FALSE
DiffPairsRouting "DiffPairsRouting - DiffPair - USB_D" [InDifferentialPair('USB_D')] p1: maxlimit=9.84 minlimit=8.27 mostfreqgap=9.84 toplayer_maxgap=8.27 toplayer_prefgap=8.27 toplayer_minwidth=5.91 toplayer_maxwidth=5.91 toplayer_prefwidth=5.91 midlayer1_mingap=9.84 midlayer1_minwidth=5.91 midlayer1_maxwidth=5.91 midlayer1_prefwidth=5.91 midlayer2_mingap=9.84 midlayer2_minwidth=5.91 midlayer2_maxwidth=5.91 midlayer2_prefwidth=5.91 midlayer3_mingap=9.84 midlayer3_minwidth=5.91 midlayer3_maxwidth=5.91 midlayer3_prefwidth=5.91 midlayer4_mingap=9.84 midlayer4_minwidth=5.91 midlayer4_maxwidth=5.91 midlayer4_prefwidth=5.91 midlayer5_mingap=9.84 midlayer5_minwidth=5.91 midlayer5_maxwidth=5.91 midlayer5_prefwidth=5.91 bottomlayer_maxgap=8.27 bottomlayer_prefgap=8.27 bottomlayer_minwidth=5.91 bottomlayer_maxwidth=5.91 bottomlayer_prefwidth=5.91 maxuncoupledlength=500
DiffPairsRouting "DiffPairsRouting - DiffPair - Default" [All] p2: maxlimit=5.91 minlimit=5.91 mostfreqgap=5.91 toplayer_minwidth=5.91 toplayer_maxwidth=5.91 toplayer_prefwidth=5.91 midlayer1_minwidth=6.3 midlayer1_maxwidth=6.3 midlayer1_prefwidth=6.3 midlayer2_minwidth=6.3 midlayer2_maxwidth=6.3 midlayer2_prefwidth=6.3 midlayer3_minwidth=6.3 midlayer3_maxwidth=6.3 midlayer3_prefwidth=6.3 midlayer4_minwidth=6.3 midlayer4_maxwidth=6.3 midlayer4_prefwidth=6.3 midlayer5_minwidth=6.3 midlayer5_maxwidth=6.3 midlayer5_prefwidth=6.3 bottomlayer_minwidth=5.91 bottomlayer_maxwidth=5.91 bottomlayer_prefwidth=5.91 maxuncoupledlength=500
FanoutControl Fanout_SOIC [IsSOIC] p1: bgadir=Out bgaviamode=Centered fanoutstyle=Auto fanoutdirection=Alternating viagrid=1 // Fanout_SOIC (Default Rule)
FanoutControl Fanout_Small [(CompPinCount < 5)] p2: bgadir=Out bgaviamode=Centered fanoutstyle=Auto fanoutdirection=OutThenIn viagrid=1 // Fanout_Small (Default Rule)
FanoutControl Fanout_LCC [IsLCC] p3: bgadir=Out bgaviamode=Centered fanoutstyle=Auto fanoutdirection=Alternating viagrid=1 // Fanout_LCC (Default Rule)
FanoutControl Fanout_BGA [IsBGA] p4: bgadir=Out bgaviamode=Centered fanoutstyle=Auto fanoutdirection=Alternating viagrid=1 // Fanout_BGA (Default Rule)
Height Height_1 [TouchesRoom('Room: DRW79403529')] p1: minheight=0 maxheight=250 prefheight=500
Height [All] p2: minheight=0 maxheight=1000 prefheight=500
HoleToHoleClearance "HoleToHoleClearance - Default - DEFAULT" [All] p1: gap=8.27 allowstackedmicrovias=TRUE
Length "Default Length" [All] p1: maxlimit=50000 minlimit=0
MaxMinImpedance "Default Impedance" [All] p1: minimum=50,00 maximum=150,0
ParallelSegment "Default Parallel Segment Adjasent" [All] p1: limit=1000 gap=200
ParallelSegment "Default Parallel Segment Same Layer" [All] p2: limit=1000 gap=200
PlaneClearance [All] p1: clearance=20
PlaneConnect "PlaneConnect - FootPrint 'TMR-D3.5-P6.2'" [HasFootprint('TMR-D3.5-P6.2')] p1: planeconnectstyle=Relief reliefexpansion=13.78 reliefentries=4 reliefconductorwidth=39.37 reliefairgap=8.27
PolygonConnect "PolygonConnect - FootPrint 'TMR-D3.5-P6.2'" [HasFootprint('TMR-D3.5-P6.2')] p1: connectstyle=Relief reliefconductorwidth=39.37 reliefentries=4 polygonreliefangle="45 Angle" airgapwidth=8.27
RoomDefinition "Room: DRW96670880" [All vs False] p1: confinementstyle=ConfineOut formatcopy=TRUE lockcomponents=FALSE outline 118.11,0 118.11,3726.38 0,3726.38 0,0 118.11,0
RoomDefinition "Room: DRW96627371" [All vs False] p2: confinementstyle=ConfineOut formatcopy=TRUE lockcomponents=FALSE outline 590.55,0 590.55,442.91 472.44,442.91 472.44,0 590.55,0
RoomDefinition "Room: DRW95221187" [All vs False] p3: confinementstyle=ConfineOut formatcopy=TRUE lockcomponents=FALSE outline 0,3214.57 6600.39,3214.57 6600.39,3332.68 627.65,3332.68 cw(c630.14,3372.3) 590.52,3369.79 590.55,3726.38 0,3726.38 0,3214.57
RoomDefinition "Room: DRW79403529" [False vs False] p4: confinementstyle=ConfineOut formatcopy=TRUE lockcomponents=FALSE outline 984.25,3017.72 984.25,1994.09 3366.26,1994.09 3366.26,3017.72 984.25,3017.72
RoomDefinition "Room: DRW72013775" [All vs False] p5: confinementstyle=ConfineOut formatcopy=TRUE lockcomponents=FALSE outline 590.55,324.8 1771.65,324.8 1771.65,442.91 590.55,442.91 590.55,324.8
RoomDefinition "Room: DRW67162181" [All vs False] p6: confinementstyle=ConfineOut formatcopy=TRUE lockcomponents=FALSE outline 3122.05,324.8 6600.39,324.8 6600.39,442.91 3122.05,442.91 3122.05,324.8
RoomDefinition "Room: DRW6551506" [All vs False] p7: confinementstyle=ConfineOut formatcopy=TRUE lockcomponents=FALSE outline 0,0 590.55,0 590.55,118.11 0,118.11 0,0
RoomDefinition "Room: DRW2244439" [All vs False] p8: confinementstyle=ConfineOut formatcopy=TRUE lockcomponents=FALSE outline 6600.39,324.8 6600.39,3332.68 6482.28,3332.68 6482.28,324.8 6600.39,324.8
RoutingLayers "RoutingLayers - Default - DEFAULT" [All] p1: top layer_v5=TRUE mid layer 1_v5=TRUE mid layer 2_v5=TRUE mid layer 3_v5=TRUE mid layer 4_v5=TRUE mid layer 5_v5=TRUE bottom layer_v5=TRUE
RoutingPriority "RoutingPriority - Default - DEFAULT" [All] p1: routingpriority=3
RoutingTopology "Default Routing Topology" [All] p1: topology=Shortest
RoutingVias "RoutingVias - Default - DEFAULT" [All] p1: holewidth=9.84 width=21.65 viastyle="Through Hole" minholewidth=9.84 minwidth=21.65 maxholewidth=9.84 maxwidth=21.65
SMDToCorner "SMDToCorner - Default - DEFAULT" [All] p1: distance=0
SolderMaskExpansion [All] p1: expansion=4 istentingtop=FALSE
Width "Width - Net - OSC_POWER" [InNet('OSC_POWER')] p1: maxlimit=236.22 minlimit=5.91 preferedwidth=39.37
Width "Width - Net - 0.95V" [InNet('0.95V') OR InNet('0.9V') OR InNet('GND')] p2: maxlimit=236.22 minlimit=5.91 preferedwidth=11.81
Width "Width - Net - 3.3V" [InNet('3.3V') OR InNet('5V') OR InNet('F_1.8V')] p3: maxlimit=236.22 minlimit=5.91 preferedwidth=11.81
Width "Width - Net - V_ASSERV" [InNet('V_ASSERV') OR InNet('12.0V')] p4: maxlimit=236.22 minlimit=5.91 preferedwidth=19.68
Width "Width - NetClass - ClearanceClass_7(RuleSet)" [InNetClass('ClearanceClass_7(RuleSet)')] p5: maxlimit=236.22 minlimit=5.91 preferedwidth=11.81
Width "Default Width" [All] p6: maxlimit=236.22 minlimit=5.91 preferedwidth=5.91
17 further rules are at their usual default settings.

## Classes and differential pairs
net class ClearanceClass_7(RuleSet): 1.8V 5.0V
net class 85OHMS: N22150 N22154 N22277 N22309 N16883644 N16883660 N16883714 N16883730 PCIE_REFCLKN PCIE_REFCLKP PCIE_RXN0 PCIE_RXN1 PCIE_RXN2 PCIE_RXN3 PCIE_RXP0 PCIE_RXP1 PCIE_RXP2 PCIE_RXP3 PCIE_TXN0 PCIE_TXN1 PCIE_TXN2 PCIE_TXN3 PCIE_TXP0 PCIE_TXP1 PCIE_TXP2 PCIE_TXP3
net class 50OHMS: USB_DM USB_DP
differential pair PCIE_RX_2: +PCIE_RXP1 -PCIE_RXN1
differential pair PCIE_RX_3: +PCIE_RXP0 -PCIE_RXN0
differential pair PCIE_RX_1: +PCIE_RXP2 -PCIE_RXN2
differential pair PCIE_REFCLK: +PCIE_REFCLKP -PCIE_REFCLKN
differential pair PCIE_RX: +PCIE_RXP3 -PCIE_RXN3
differential pair N168836: +N16883660 -N16883644
differential pair N168837: +N16883730 -N16883714
differential pair N22: +N22309 -N22277
differential pair USB_D: +USB_DP -USB_DM
differential pair N2215: +N22150 -N22154

## Components (designator, comment, footprint, x,y, rotation, side; value= is the part's Value field where it differs from the comment)
C1 "C-0402R" C-0402R 2413.39,958.66 r270 bottom
C2 "C-0402R" C-0402R 2492.13,1047.24 r270 bottom
C3 "C-0402R" C-0402R 2314.96,1431.1 r0 bottom
C4 "C-0402R" C-0402R 2492.13,946.85 r270 bottom
C5 "C-0402R" C-0402R 2354.33,1293.31 r90 bottom
C6 "C-0402R" C-0402R 2413.39,1334.65 r90 bottom
C7 "C-0402R" C-0402R 2582.68,1194.88 r0 bottom
C8 "C-0402R" C-0402R 2275.59,938.98 r270 bottom
C9 "C-0402R" C-0402R 2570.87,1372.05 r90 bottom
C10 "C-0402R" C-0402R 2543.31,1450.79 r0 bottom
C11 "C-0805R" C-0805R 2098.43,862.2 r180 bottom
C12 "C-0805R" C-0805R 2728.35,1147.64 r0 bottom
C13 "C-0805R" C-0805R 2724.41,1860.24 r180 bottom
C14 "C-0805R" C-0805R 2019.69,1293.31 r180 bottom
C15 "C-0402R" C-0402R 2228.35,1440.94 r90 bottom
C16 "C-0402R" C-0402R 2236.22,1116.14 r180 bottom
C17 "C-0402R" C-0402R 2738.19,1772.64 r180 bottom
C18 "C-0402R" C-0402R 2175.2,1409.45 r90 bottom
C19 "C-0402R" C-0402R 2413.39,1423.23 r90 bottom
C20 "C-0402R" C-0402R 2413.39,1047.24 r90 bottom
C21 "C-0402R" C-0402R 2511.81,1135.83 r0 bottom
C22 "C-0402R" C-0402R 2413.39,1246.06 r90 bottom
C23 "C-0402R" C-0402R 2196.85,899.61 r270 bottom
C24 "C-0402R" C-0402R 2041.34,1391.73 r180 bottom
C25 "C-0402R" C-0402R 2346.46,1155.51 r0 bottom
C26 "C-0402R" C-0402R 2434.06,1491.14 r180 bottom
C27 "C-0402R" C-0402R 2413.39,1135.83 r90 bottom
C28 "C-0402R" C-0402R 2600.39,1135.83 r0 bottom
C29 "C-0402R" C-0402R 2706.69,1234.25 r0 bottom
C30 "C-0402R" C-0402R 2334.65,1047.24 r90 bottom
C31 "C-0402R" C-0402R 2480.32,1194.88 r0 bottom
C32 "C-0402R" C-0402R 2346.46,929.13 r180 bottom
C33 "C-0402R" C-0402R 2401.57,1790.35 r0 bottom
C34 "C-0402R" C-0402R 2480.32,1273.62 r0 bottom
C35 "C-0805R" C-0805R 2415.35,1860.24 r0 bottom
C36 "C-0402R" C-0402R 2588.58,938.98 r0 bottom
C37 "C-0402R" C-0402R 2786.42,1430.12 r0 bottom
C38 "C-0402R" C-0402R 2196.85,1627.95 r180 bottom
C39 "C-0402R" C-0402R 2244.09,1037.4 r180 bottom
C40 "C-0402R" C-0402R 2590.55,1037.4 r0 bottom
C41 "C-0402R" C-0402R 2216.54,1183.07 r270 bottom
C42 "C-0402R" C-0402R 2899.61,1352.36 r0 bottom
C43 "C-0402R" C-0402R 2866.14,1234.25 r0 bottom
C44 "C-0402R" C-0402R 2158.46,1037.4 r180 bottom
C45 "C-0402R" C-0402R 1824.8,722.44 r180 bottom
C46 "C-0402R" C-0402R 2779.53,1076.77 r0 bottom
C47 "C-0805R" C-0805R 1801.18,1637.8 r180 bottom
C48 "C-0805R" C-0805R 2204.72,1843.5 r180 bottom
C49 "C-0805R" C-0805R 2700.79,1352.36 r270 bottom
C50 "C-0805R" C-0805R 1805.12,795.28 r180 bottom
C51 "C-0402R" C-0402R 1821.85,1568.9 r180 bottom
C52 "C-0402R" C-0402R 2119.09,957.68 r180 bottom
C53 "C-0402R" C-0402R 2040.35,1194.88 r180 bottom
C54 "C-0402R" C-0402R 2295.28,1222.44 r270 bottom
C55 "C-0402R" C-0402R 2218.5,1772.64 r180 bottom
C56 "C-0402R" C-0402R 2001.97,998.03 r180 bottom
C57 "C-0402R" C-0402R 2786.42,1352.36 r0 bottom
C58 "C-0402R" C-0402R 2157.48,1273.62 r180 bottom
C59 "C-0402R" C-0402R 2137.8,1135.83 r270 bottom
C60 "C-0402R" C-0402R 2582.68,1273.62 r0 bottom
C61 "C-0402R" C-0402R 2236.22,1509.84 r180 bottom
C62 "C-0402R" C-0402R 2866.14,1037.4 r0 bottom
C63 "C-0402R" C-0402R 2039.37,1076.77 r180 bottom
C64 "C-0402R" C-0402R 2157.48,1326.77 r180 bottom
C65 "C-0402R" C-0402R 2283.46,1588.58 r180 bottom
C66 "C-0402R" C-0402R 2818.9,958.66 r0 bottom
C67 "C-0402R" C-0402R 2531.5,779.53 r270 bottom
C68 "C-0402R" C-0402R 2413.39,862.2 r90 bottom
C69 "C-0402R" C-0402R 2334.65,862.2 r90 bottom
C70 "C-0402R" C-0402R 2531.5,862.2 r90 bottom
C71 "C-0402R" C-0402R 3049.21,919.29 r90 bottom
C72 "C-0402R" C-0402R 2610.24,862.2 r90 bottom
C73 "C-0402R" C-0402R 2610.24,779.53 r270 bottom
C74 "C-0402R" C-0402R 2413.39,779.53 r270 bottom
C75 "C-0805R" C-0805R 3130.91,933.07 r90 bottom
C76 "C-0402R" C-0402R 2334.65,779.53 r270 bottom
C77 "C-0402R" C-0402R 600.39,1391.73 r90 bottom
C78 "C-0402R" C-0402R 1043.31,1652.56 r90 top
C79 "C-0402R" C-0402R 1043.31,1214.57 r270 top
C80 "C-0402R" C-0402R 1590.55,525.59 r0 top
C81 "C-0402R" C-0402R 1278.54,973.43 r180 bottom
C82 "C-0402R" C-0402R 1043.31,1452.76 r90 top
C83 "C-0402R" C-0402R 1043.31,1314.96 r270 top
C84 "C-0402R" C-0402R 1560.04,1809.06 r0 bottom
C85 "C-0402R" C-0402R 1560.04,905.51 r0 top
C86 "C-0402R" C-0402R 1226.38,1463.58 r0 bottom
C87 "C-1206R" C-1206R 3940.94,2903.54 r90 bottom
C88 "C-1206R" C-1206R 3698.82,2769.69 r0 bottom
C89 "C-1206R" C-1206R 3698.82,2661.42 r0 bottom
C90 "CC1210" CC1210 4574.8,2952.76 r90 top
C91 "CC1210" CC1210 5057.09,2849.41 r270 top
C92 "C-0402R" C-0402R 4645.67,3138.78 r270 top
C93 "CC1210" CC1210 4654.53,2739.17 r0 bottom
C94 "CC1210" CC1210 4654.53,2599.41 r0 bottom
C95 "C-0402R" C-0402R 4768.7,3181.1 r0 top
C96 "C-0402R" C-0402R 4840.55,3163.39 r90 top
C97 "C-1206R" C-1206R 2163.09,2465.55 r270 bottom
C98 "C-1206R" C-1206R 2459.65,2465.55 r270 bottom
C99 "C-0402R" C-0402R 2323.82,2638.78 r270 bottom
C100 "CC1210" CC1210 2162.4,2258.86 r90 bottom
C101 "CC1210" CC1210 2465.55,2258.86 r90 bottom
C102 "C-0402R" C-0402R 3645.67,687.01 r180 bottom
C103 "C-1206R" C-1206R 3474.41,838.58 r180 bottom
C104 "C-1206R" C-1206R 3474.41,545.28 r180 bottom
C105 "CC1210" CC1210 3272.64,555.12 r0 bottom
C106 "CC1210" CC1210 3272.64,838.58 r0 bottom
C107 "C-1206R" C-1206R 2819.59,2465.55 r270 bottom
C108 "C-1206R" C-1206R 3116.14,2465.55 r270 bottom
C109 "C-0402R" C-0402R 2980.32,2638.78 r270 bottom
C110 "CC1210" CC1210 2818.9,2258.86 r90 bottom
C111 "CC1210" CC1210 3122.05,2258.86 r90 bottom
C112 "C-1206R" C-1206R 4527.56,2950.79 r90 bottom
C113 "C-1206R" C-1206R 4244.09,2769.69 r0 bottom
C114 "C-1206R" C-1206R 4244.09,2661.42 r0 bottom
C115 "C-0402R" C-0402R 5484.25,2755.91 r0 bottom
C116 "CC1210" CC1210 5481.3,2866.14 r0 bottom
C117 "CC1210" CC1210 5057.09,3092.52 r90 top
C118 "C-1206R" C-1206R 4224.41,3060.04 r90 top
C119 "C-1206R" C-1206R 4335.63,3060.04 r90 top
C120 "C-1206R" C-1206R 5004.92,2488.19 r90 bottom
C121 "C-0402R" C-0402R 3295.28,1694.88 r180 top
C122 "C-1206R" C-1206R 5324.8,2488.19 r90 bottom
C123 "C-0402R" C-0402R 3437.99,1298.23 r180 top
C124 "C-0402R" C-0402R 3437.99,1350.39 r180 top
C125 "C-1206R" C-1206R 3622.05,848.43 r0 top
C126 "C-0402R" C-0402R 3584.65,933.07 r0 top
C127 "C-0402R" C-0402R 3633.86,1349.41 r0 top
C128 "CC1210" CC1210 3704.72,1618.11 r90 top
C129 "C-0402R" C-0402R 3541.34,1676.18 r90 top
C130 "C-1206R" C-1206R 4228.35,2089.57 r0 top
C131 "C-0402R" C-0402R 4190.94,2011.81 r0 top
C132 "C-0402R" C-0402R 4265.75,1724.41 r0 top
C133 "C-0402R" C-0402R 3832.68,1869.09 r90 top
C134 "C-0402R" C-0402R 4104.33,1436.02 r180 top
C135 "C-0402R" C-0402R 4247.05,1628.94 r270 top
C136 "C-0402R" C-0402R 3672.24,1905.51 r90 top
C137 "C-0402R" C-0402R 4369.09,1928.15 r90 top
C138 "C-0402R" C-0402R 3935.04,1894.69 r90 top
C139 "C-0402R" C-0402R 3957.68,688.98 r180 top
C140 "C-0402R" C-0402R 3888.78,1054.13 r0 top
C141 "C-0402R" C-0402R 3888.78,1107.28 r0 top
C142 "C-0402R" C-0402R 3851.38,1454.72 r0 top
C143 "C-0402R" C-0402R 3851.38,1276.57 r180 top
C144 "C-0402R" C-0402R 4313.98,1221.46 r180 top
C145 "C-0402R" C-0402R 4313.98,1487.2 r180 top
C146 "C-0402R" C-0402R 1139.76,2246.06 r90 bottom
C147 "C-0402R" C-0402R 909.45,2225.39 r90 bottom
C148 "C-0402R" C-0402R 1182.09,2079.72 r90 top
C149 "C-0402R" C-0402R 552.17,3011.81 r180 bottom
C150 "C-0402R" C-0402R 582.68,2720.47 r0 bottom
C151 "C-0402R" C-0402R 425.2,2650.59 r180 top
C152 "C-0402R" C-0402R 635.83,2823.82 r270 bottom
C153 "C-0402R" C-0402R 901.57,2655.51 r180 bottom
C154 "C-0402R" C-0402R 840.55,2823.82 r270 bottom
C155 "C-0402R" C-0402R 773.62,2479.33 r90 bottom
C156 "C-0402R" C-0402R 746.06,2823.82 r270 bottom
C157 "C-0402R" C-0402R 717.52,2479.33 r90 bottom
C158 "C-0402R" C-0402R 901.57,2600.39 r180 bottom
C159 "C-0402R" C-0402R 572.83,2525.59 r0 bottom
C160 "C-0402R" C-0402R 316.93,2732.28 r180 top
C161 "C-0402R" C-0402R 331.69,3017.72 r180 bottom
C162 "C-0402R" C-0402R 467.52,2472.44 r270 bottom
C163 "C-0402R" C-0402R 255.91,2999.02 r180 top
C164 "C-1206R" C-1206R 746.06,3067.91 r90 top
C165 "C-0402R" C-0402R 1224.41,2782.48 r90 top
C166 "C-0402R" C-0402R 1081.69,2625 r0 top
C167 "C-0402R" C-0402R 817.91,2245.08 r0 top
C168 "C-0402R" C-0402R 717.52,2348.43 r90 top
C169 "C-0402R" C-0402R 717.52,2263.78 r270 top
C170 "C-0402R" C-0402R 611.22,2108.27 r90 top
C171 "C-1206R" C-1206R 689.96,2032.48 r270 top
C172 "C-0402R" C-0402R 374.02,1958.66 r180 top
C173 "C-0402R" C-0402R 378.94,2205.71 r180 top
C174 "C-0402R" C-0402R 470.47,2150.59 r0 top
C175 "C-0402R" C-0402R 611.22,1906.5 r270 top
C176 "C-0402R" C-0402R 2242.13,507.87 r90 bottom
C177 "C-0402R" C-0402R 2297.24,507.87 r90 bottom
C178 "C-0402R" C-0402R 2356.3,507.87 r90 bottom
C179 "C-0402R" C-0402R 2411.42,507.87 r90 bottom
C180 "C-0402R" C-0402R 2470.47,507.87 r90 bottom
C181 "C-0402R" C-0402R 2525.59,507.87 r90 bottom
C182 "C-0402R" C-0402R 2584.65,507.87 r90 bottom
C183 "C-0402R" C-0402R 2639.76,507.87 r90 bottom
C184 "C-0402R" C-0402R 370.08,1337.6 r0 top
C185 "C-0402R" C-0402R 370.08,1390.75 r0 top
C186 "C-0402R" C-0402R 369.09,1619.09 r270 top
C187 "C-0402R" C-0402R 285.43,1539.37 r90 top
C188 "C-0402R" C-0402R 1728.35,1461.61 r0 bottom
C189 "C-0402R" C-0402R 1641.73,1461.61 r180 bottom
C190 "C-0402R" C-0402R 2384.84,1856.3 r270 top
C191 "C-0402R" C-0402R 2366.14,1929.13 r180 top
C192 "C-0402R" C-0402R 804.13,822.83 r0 bottom
C193 "C-0402R" C-0402R 2801.18,3137.8 r0 top
C194 "C-0402R" C-0402R 2899.61,3139.76 r0 top
C195 "C-0402R" C-0402R 3000,3139.76 r0 top
C196 "C-0402R" C-0402R 3100.39,3139.76 r0 top
C197 "C-0402R" C-0402R 1728.35,1186.02 r0 bottom
C198 "C-0402R" C-0402R 1641.73,1186.02 r180 bottom
C199 "C-0402R" C-0402R 618.11,1937.01 r0 bottom
C200 "C-0402R" C-0402R 409.45,2047.24 r270 bottom
C201 "C-0402R" C-0402R 528.54,2047.24 r180 bottom
C202 "C-0402R" C-0402R 461.61,2047.24 r270 bottom
C203 "C-0402R" C-0402R 784.45,2014.76 r270 bottom
C204 "C-0402R" C-0402R 575.79,2276.57 r90 bottom
C205 "C-0402R" C-0402R 1000.98,823.82 r180 top
C206 "C-0402R" C-0402R 430.12,2393.7 r0 bottom
C207 "C-0402R" C-0402R 746.06,1484.25 r0 bottom
C208 "C-0402R" C-0402R 411.42,1540.35 r270 bottom
C209 "C-0402R" C-0402R 671.26,1600.39 r270 bottom
C210 "C-0402R" C-0402R 492.13,1540.35 r270 bottom
C211 "C-0402R" C-0402R 917.32,1619.09 r0 bottom
C212 "C-0402R" C-0402R 591.54,1724.41 r90 bottom
C213 "C-0402R" C-0402R 413.39,1784.45 r90 bottom
C214 "C-0402R" C-0402R 625,1192.91 r90 bottom
C215 "C-0402R" C-0402R 533.46,1090.55 r0 bottom
C216 "C-0402R" C-0402R 485.24,1370.08 r180 bottom
C217 "C-0402R" C-0402R 425.2,1193.9 r90 bottom
C218 "C-0402R" C-0402R 1221.46,1186.02 r180 top
C219 "C-0402R" C-0402R 484.25,841.54 r90 bottom
C220 "C-0402R" C-0402R 431.1,750 r0 bottom
C221 "C-0402R" C-0402R 515.75,972.44 r0 bottom
C222 "C-0402R" C-0402R 158.46,833.66 r180 bottom
D1 "D-SMB-R" D-SMB-R 5134.84,2645.67 r0 top
D2 "D-SMB-R" D-SMB-R 5511.81,2866.14 r180 top
D3 "D-SOT23R" D-SOT23R 3986.22,1454.72 r90 top
D4 "D-SOT143-R" D-SOT143-R 426.18,2617.13 r90 bottom
D5 "D-SOT23R" D-SOT23R 467.52,1600.39 r90 top
D6 "D-SOD323-RA" D-SOD323-RA 454.72,2328.74 r180 bottom
D7 "D-SOD323-RB" D-SOD323-RB 482.28,1809.06 r270 bottom
DS1 "DL-KINGBRIGHT-APHD1608LZGCK" DL-KINGBRIGHT-APHD1608LZGCK 2006.89,3156.5 r270 top
DS2 "DL-KINGBRIGHT-APHD1608LZGCK" DL-KINGBRIGHT-APHD1608LZGCK 2180.12,3156.5 r270 top
DS3 "DL-KINGBRIGHT-APHD1608LZGCK" DL-KINGBRIGHT-APHD1608LZGCK 2349.41,3156.5 r270 top
DS4 "DL-KINGBRIGHT-APTD1608LSURCK" DL-KINGBRIGHT-APTD1608LSURCK 2530.51,3154.53 r270 top
DS5 "DL-KINGBRIGHT-APTD1608LSURCK" DL-KINGBRIGHT-APTD1608LSURCK 2703.74,3154.53 r270 top
H1 "TMR-D3.5-P6.2" TMR-D3.5-P6.2 295.28,190.94 r0 top
H2 "TMR-D3.5-P6.2" TMR-D3.5-P6.2 295.28,3553.15 r0 top
HE1 "M-WE-WA-SMST-M3-9774080360R" M-WE-WA-SMST-M3-9774080360R 984.25,1994.09 r0 top
HE2 "M-WE-WA-SMST-M3-9774080360R" M-WE-WA-SMST-M3-9774080360R 984.25,3017.72 r0 top
HE3 "M-WE-WA-SMST-M3-9774080360R" M-WE-WA-SMST-M3-9774080360R 3366.26,3017.72 r0 top
HE4 "M-WE-WA-SMST-M3-9774080360R" M-WE-WA-SMST-M3-9774080360R 3366.26,1994.09 r0 top
J1 "J-TSM-105-02-DV" J-TSM-105-02-DV 814.96,1434.06 r90 top
J2 "J-MOLEX-45586-0005" J-MOLEX-45586-0005 6055.12,2757.87 r0 top
J3 "J-SAMTEC-SQW-105-01-F-D-VS" J-SAMTEC-SQW-105-01-F-D-VS 1074.8,2364.17 r270 top
J4 "J-SAMTEC-ERF5-050-05.0-L-DVA" J-SAMTEC-ERF5-050-05.0-L-DVA 1417.32,2505.91 r90 top
J5 "J-MOLEX-USB-C-2169890001" J-MOLEX-USB-C-2169890001 332.68,2846.46 r270 top
J6 "J-CINCH-142-0701-551-SMA" J-CINCH-142-0701-551-SMA 157.48,2356.3 r0 top
J7 "J-CINCH-142-0701-551-SMA" J-CINCH-142-0701-551-SMA 157.48,1765.75 r0 top
J8 "J-CINCH-142-0701-551-SMA" J-CINCH-142-0701-551-SMA 157.48,1175.2 r0 top
J9 "J-CINCH-142-0701-551-SMA" J-CINCH-142-0701-551-SMA 157.48,584.65 r0 top
J10 "J-SAMTEC-TSM-102-01-F-SH" J-SAMTEC-TSM-102-01-F-SH 1761.81,2805.12 r0 top
L1 "L-BLM18-R" L-BLM18-R 2344.49,1934.06 r0 bottom
L2 "L-PULSE-PA4341.XXXNLT" L-PULSE-PA4341.XXXNLT 4763.78,2674.21 r270 top
L3 "L-IHLP-1212BZ-11" L-IHLP-1212BZ-11 2313.98,2274.61 r180 bottom
L4 "L-IHLP-1212BZ-11" L-IHLP-1212BZ-11 3275.59,696.85 r90 bottom
L5 "L-IHLP-1212BZ-11" L-IHLP-1212BZ-11 2970.47,2274.61 r180 bottom
L6 "L-VISHAY-IHLP-2020CZ-01" L-VISHAY-IHLP-2020CZ-01 5331.69,3079.72 r270 top
L7 "L-BOURNS-SRU8043" L-BOURNS-SRU8043 4335.63,2732.28 r0 top
L8 "L-FAIR-RITE-2512061217Y5" L-FAIR-RITE-2512061217Y5 5165.35,2432.09 r0 bottom
L9 "L-LAIRD-LI0402D121R-10" L-LAIRD-LI0402D121R-10 3549.21,1323.82 r270 top
L10 "L-LAIRD-LI0402D121R-10" L-LAIRD-LI0402D121R-10 3496.06,874.02 r90 top
L11 "L-COILCRAFT-1812CS" L-COILCRAFT-1812CS 4123.03,1642.72 r90 top
L12 "L-0805CS-R" L-0805CS-R 3832.68,1732.28 r90 top
L13 "L-0805CS-R" L-0805CS-R 3750.98,1921.26 r90 top
L14 "L-LAIRD-LI0402D121R-10" L-LAIRD-LI0402D121R-10 1247.05,2127.95 r270 bottom
L15 "L-LAIRD-LI0402D121R-10" L-LAIRD-LI0402D121R-10 1144.69,2127.95 r270 bottom
L16 "L-LAIRD-LI0402D121R-10" L-LAIRD-LI0402D121R-10 1197.83,2127.95 r270 bottom
L17 "L-0805CS-R" L-0805CS-R 711.61,3011.81 r180 bottom
MIRE1 "MIRE-ACT" MIRE-ACT 100.39,358.27 r0 top
MIRE2 "MIRE-ACT" MIRE-ACT 6482.28,3253.94 r0 top
MIRE3 "MIRE-ACT" MIRE-ACT 118.11,358.27 r180 bottom
MIRE4 "MIRE-ACT" MIRE-ACT 6482.28,3175.2 r180 bottom
OSC1 "Y-SPECTRATIME-MRO-50" Y-SPECTRATIME-MRO-50 5444.88,1484.25 r180 top
OSC2 "Y-SPECTRACOM-XO00980M" Y-SPECTRACOM-XO00980M 5444.88,1267.72 r0 top
OSC3 "Y-RAKON-OCXO-ROX-3827-T2" Y-RAKON-OCXO-ROX-3827-T2 5444.88,1129.92 r180 top
OSC4 "Y-RAKON-OCXO-ROX-5242-T1-EM" Y-RAKON-OCXO-ROX-5242-T1-EM 5444.88,1484.25 r90 top
PD1 "PT-SINGLE-SIDE-1.5" PT-SINGLE-SIDE-1.5 691.93,2918.31 r270 bottom
PD2 "PT-SINGLE-SIDE-1.5" PT-SINGLE-SIDE-1.5 683.07,2599.41 r270 bottom
PD3 "PT-SINGLE-SIDE-1.5" PT-SINGLE-SIDE-1.5 3730.71,2244.09 r180 bottom
PD4 "PT-SINGLE-SIDE-1.5" PT-SINGLE-SIDE-1.5 3830.71,2244.09 r180 bottom
PD5 "PT-SINGLE-SIDE-1.5" PT-SINGLE-SIDE-1.5 3930.71,2244.09 r180 bottom
PD6 "PT-SINGLE-SIDE-1.5" PT-SINGLE-SIDE-1.5 4030.71,2244.09 r180 bottom
PD7 "PT-SINGLE-SIDE-1.5" PT-SINGLE-SIDE-1.5 4130.71,2244.09 r180 bottom
PD8 "PT-SINGLE-SIDE-1.5" PT-SINGLE-SIDE-1.5 4230.71,2244.09 r180 bottom
PD9 "PT-SINGLE-SIDE-1.5" PT-SINGLE-SIDE-1.5 4330.71,2244.09 r180 bottom
Q1 "D-SOT23R" D-SOT23R 2006.89,3017.72 r0 top
Q2 "D-SOT23R" D-SOT23R 2180.12,3019.69 r0 top
Q3 "D-SOT23R" D-SOT23R 2349.41,3021.65 r0 top
Q4 "D-SOT23R" D-SOT23R 2530.51,3019.69 r0 top
Q5 "D-SOT23R" D-SOT23R 2703.74,3019.69 r0 top
R1 "R-0402R" R-0402R 1499.02,1132.87 r0 top
R2 "R-0402R" R-0402R 1499.02,973.43 r0 top
R3 "R-0402R" R-0402R 3114.17,998.03 r180 top
R4 "R-0402R" R-0402R 3114.17,1196.85 r180 top
R5 "R-0402R" R-0402R 2204.72,1856.3 r270 top
R6 "R-0402R" R-0402R 3129.92,1549.21 r180 top
R7 "R-0402R" R-0402R 3129.92,1494.09 r180 top
R8 "R-0402R" R-0402R 1856.3,1396.65 r90 bottom
R9 "R-0402R" R-0402R 2177.17,1997.05 r270 top
R10 "R-0402R" R-0402R 1874.02,1856.3 r270 top
R11 "R-0402R" R-0402R 1929.13,1856.3 r270 top
R12 "R-0402R" R-0402R 2122.05,1997.05 r270 top
R13 "R-0402R" R-0402R 1956.69,1997.05 r270 top
R14 "R-0402R" R-0402R 1611.22,1461.61 r0 top
R15 "R-0402R" R-0402R 2084.65,1509.84 r0 bottom
R16 "R-0402R" R-0402R 1418.31,628.94 r0 bottom
R17 "R-0402R" R-0402R 1418.31,734.25 r0 bottom
R18 "R-0402R" R-0402R 1418.31,838.58 r0 bottom
R19 "R-0402R" R-0402R 1499.02,1027.56 r0 top
R20 "R-0402R" R-0402R 1499.02,1239.17 r0 top
R21 "R-0402R" R-0402R 1499.02,1239.17 r0 bottom
R22 "R-0402R" R-0402R 1499.02,1345.47 r0 top
R23 "R-0402R" R-0402R 1499.02,1345.47 r0 bottom
R24 "R-0402R" R-0402R 1418.31,681.1 r180 bottom
R25 "R-0402R" R-0402R 1418.31,786.42 r180 bottom
R26 "R-0402R" R-0402R 1418.31,890.75 r180 bottom
R27 "R-0402R" R-0402R 1499.02,1079.72 r180 top
R28 "R-0402R" R-0402R 1499.02,1186.02 r180 top
R29 "R-0402R" R-0402R 1499.02,1186.02 r180 bottom
R30 "R-0402R" R-0402R 1499.02,1293.31 r180 top
R31 "R-0402R" R-0402R 1499.02,1293.31 r180 bottom
R32 "R-0402R" R-0402R 1376.97,1186.02 r0 bottom
R33 "R-0402R" R-0402R 1376.97,973.43 r0 bottom
R34 "R-0402R" R-0402R 2066.93,1997.05 r270 top
R35 "R-0402R" R-0402R 2039.37,1856.3 r270 top
R36 "R-0402R" R-0402R 2149.61,1856.3 r270 top
R37 "R-0402R" R-0402R 1097.44,1652.56 r270 top
R38 "R-0402R" R-0402R 1097.44,1452.76 r270 top
R39 "R-0402R" R-0402R 1097.44,1314.96 r90 top
R40 "R-0402R" R-0402R 1711.61,635.83 r0 top
R41 "R-0402R" R-0402R 2011.81,1997.05 r90 top
R42 "R-0402R" R-0402R 1097.44,1214.57 r270 top
R43 "R-0402R" R-0402R 1984.25,1856.3 r90 top
R44 "R-0402R" R-0402R 2094.49,1856.3 r90 top
R45 "R-0402R" R-0402R 1728.35,856.3 r90 top
R46 "R-0402R" R-0402R 1728.35,509.84 r90 top
R47 "R-0402R" R-0402R 1541.34,1459.65 r90 top
R48 "R-0402R" R-0402R 1343.5,1713.58 r0 bottom
R49 "R-0402R" R-0402R 1490.16,1459.65 r90 top
R50 "R-0402R" R-0402R 3114.17,860.24 r180 top
R51 "R-0402R" R-0402R 1343.5,1658.46 r0 bottom
R52 "R-0402R" R-0402R 3129.92,1659.45 r180 top
R53 "R-0402R" R-0402R 1343.5,1520.67 r0 bottom
R54 "R-0402R" R-0402R 3114.17,1273.62 r180 top
R55 "R-0402R" R-0402R 1343.5,1579.72 r0 bottom
R56 "R-0402R" R-0402R 1211.61,1755.91 r180 top
R57 "R-0402R" R-0402R 3129.92,1604.33 r180 top
R58 "R-0402R" R-0402R 1363.19,1755.91 r0 top
R59 "R-0402R" R-0402R 3114.17,1328.74 r180 top
R60 "R-0402R" R-0402R 3114.17,1438.98 r180 top
R61 "R-0402R" R-0402R 3114.17,1383.86 r180 top
R62 "R-0402R" R-0402R 1226.38,1312.01 r90 top
R63 "R-0402R" R-0402R 3556.1,2859.25 r90 bottom
R64 "R-0402R" R-0402R 4944.88,2954.72 r90 top
R65 "R-0402R" R-0402R 4591.54,3138.78 r270 top
R66 "R-0402R" R-0402R 3556.1,2946.85 r90 bottom
R67 "R-0402R" R-0402R 4537.4,3138.78 r90 top
R68 "R-0402R" R-0402R 4768.7,3129.92 r180 top
R69 "R-0402R" R-0402R 4699.8,3138.78 r90 top
R70 "R-0402R" R-0402R 4944.88,3041.34 r90 top
R71 "R-0402R" R-0402R 4900.59,3164.37 r90 top
R72 "R-0402R" R-0402R 2387.8,2638.78 r270 bottom
R73 "R-0603R" R-0603R 2459.65,2648.62 r90 bottom
R74 "R-0402R" R-0402R 2249.02,2597.44 r180 bottom
R75 "R-0402R" R-0402R 3645.67,635.83 r180 bottom
R76 "R-0603R" R-0603R 3655.51,572.83 r0 bottom
R77 "R-0402R" R-0402R 3645.67,742.13 r0 bottom
R78 "R-0603R" R-0603R 3044.29,2648.62 r270 bottom
R79 "R-0603R" R-0603R 3116.14,2648.62 r90 bottom
R80 "R-0402R" R-0402R 2905.51,2597.44 r180 bottom
R81 "R-0402R" R-0402R 4087.6,2859.25 r90 bottom
R82 "R-0402R" R-0402R 4087.6,2948.82 r90 bottom
R83 "R-1206R" R-1206R 3698.82,2490.16 r0 bottom
R84 "R-1206R" R-1206R 3943.9,2560.04 r270 bottom
R85 "R-1206R" R-1206R 4097.44,2560.04 r270 bottom
R86 "R-0402R" R-0402R 3625.98,1455.71 r180 top
R87 "R-0402R" R-0402R 3541.34,1578.74 r270 top
R88 "R-0402R" R-0402R 3549.21,1437.01 r90 top
R89 "R-0402R" R-0402R 3437.99,1761.81 r0 top
R90 "R-0402R" R-0402R 3593.5,1676.18 r270 top
R91 "R-0402R" R-0402R 4339.57,1798.23 r270 top
R92 "R-0402R" R-0402R 4123.03,1271.65 r90 top
R93 "R-0402R" R-0402R 4123.03,1361.22 r90 top
R94 "R-0402R" R-0402R 4265.75,1779.53 r180 top
R95 "R-1206R" R-1206R 3935.04,1752.95 r90 top
R96 "R-0402R" R-0402R 4339.57,1705.71 r270 top
R97 "R-0402R" R-0402R 4312.99,1928.15 r270 top
R98 "R-1206R" R-1206R 3590.55,1831.69 r90 top
R99 "R-0402R" R-0402R 3991.14,1894.69 r270 top
R100 "R-0402R" R-0402R 3832.68,1616.14 r90 top
R101 "R-0402R" R-0402R 4769.69,1279.53 r0 bottom
R102 "R-0402R" R-0402R 4299.21,769.69 r90 top
R103 "R-0402R" R-0402R 4769.69,1180.12 r0 bottom
R104 "R-0402R" R-0402R 3809.06,959.65 r180 top
R105 "R-0402R" R-0402R 4316.93,974.41 r0 top
R106 "R-0402R" R-0402R 3884.84,978.35 r90 top
R107 "R-0402R" R-0402R 4316.93,908.46 r0 top
R108 "R-0402R" R-0402R 4316.93,857.28 r0 top
R109 "R-0402R" R-0402R 3851.38,1386.81 r0 top
R110 "R-0402R" R-0402R 3967.52,1276.57 r180 top
R111 "R-0402R" R-0402R 5647.64,2115.16 r0 bottom
R112 "R-0402R" R-0402R 3832.68,1527.56 r270 top
R113 "R-0402R" R-0402R 4049.21,1163.39 r0 top
R114 "R-0402R" R-0402R 3851.38,1331.69 r180 top
R115 "R-0402R" R-0402R 3967.52,1331.69 r0 top
R116 "R-0402R" R-0402R 3797.24,1170.28 r270 top
R117 "R-0402R" R-0402R 4123.03,1182.09 r270 top
R118 "R-0402R" R-0402R 3251.97,958.66 r90 top
R119 "R-0402R" R-0402R 3306.1,958.66 r90 top
R120 "R-0603R" R-0603R 3239.17,1216.54 r180 top
R121 "R-0402R" R-0402R 3344.49,1141.73 r180 top
R122 "R-0402R" R-0402R 3344.49,1086.61 r180 top
R123 "R-0402R" R-0402R 1193.9,2246.06 r90 bottom
R124 "R-0402R" R-0402R 1150.59,2364.17 r0 bottom
R125 "R-0402R" R-0402R 1013.78,2285.43 r0 bottom
R126 "R-0402R" R-0402R 1013.78,2442.91 r0 bottom
R129 "R-0402R" R-0402R 425.2,2732.28 r0 top
R130 "R-0402R" R-0402R 603.35,2466.54 r180 bottom
R131 "R-0402R" R-0402R 467.52,2582.68 r90 top
R132 "R-0402R" R-0402R 417.32,2582.68 r270 top
R133 "R-0402R" R-0402R 414.37,2509.84 r180 top
R134 "R-0402R" R-0402R 414.37,2453.74 r180 top
R135 "R-0402R" R-0402R 657.48,3030.51 r90 top
R136 "R-0402R" R-0402R 657.48,3113.19 r90 top
R137 "R-0402R" R-0402R 142.72,2664.37 r270 top
R138 "R-0402R" R-0402R 142.72,2577.76 r270 top
R139 "R-0402R" R-0402R 629.92,2257.87 r270 bottom
R141 "R-0402R" R-0402R 1944.88,3167.32 r270 top
R142 "R-0402R" R-0402R 284.45,2015.75 r0 top
R143 "R-0402R" R-0402R 1816.93,478.35 r0 bottom
R144 "R-0402R" R-0402R 2118.11,3167.32 r270 top
R145 "R-0402R" R-0402R 1816.93,533.46 r0 bottom
R146 "R-0402R" R-0402R 374.02,2014.76 r0 top
R147 "R-1206R" R-1206R 416.34,2281.5 r0 top
R148 "R-0402R" R-0402R 284.45,1958.66 r180 top
R149 "R-0402R" R-0402R 611.22,1995.08 r270 top
R150 "R-0402R" R-0402R 1990.16,507.87 r270 bottom
R151 "R-0402R" R-0402R 2045.28,507.87 r90 bottom
R152 "R-0402R" R-0402R 2287.4,3167.32 r270 top
R153 "R-0402R" R-0402R 470.47,2205.71 r180 top
R154 "R-0402R" R-0402R 2468.5,3168.31 r270 top
R155 "R-0402R" R-0402R 231.3,1450.79 r90 top
R156 "R-0402R" R-0402R 554.13,1477.36 r90 top
R157 "R-0402R" R-0402R 2641.73,3168.31 r270 top
R158 "R-0402R" R-0402R 231.3,1539.37 r90 top
R159 "R-0402R" R-0402R 499.02,1477.36 r270 top
R160 "R-0402R" R-0402R 284.45,1450.79 r270 top
R161 "R-1206R" R-1206R 466.54,1786.42 r90 top
R162 "R-1206R" R-1206R 369.09,1786.42 r90 top
R163 "R-1206R" R-1206R 610.24,787.4 r180 bottom
R164 "R-1206R" R-1206R 610.24,691.93 r180 bottom
R165 "R-1206R" R-1206R 610.24,595.47 r180 bottom
R166 "R-1206R" R-1206R 610.24,499.02 r180 bottom
R167 "R-1206R" R-1206R 1192.91,500 r0 bottom
R168 "R-1206R" R-1206R 1192.91,595.47 r0 bottom
R169 "R-1206R" R-1206R 1192.91,690.94 r0 bottom
R170 "R-1206R" R-1206R 1192.91,787.4 r0 bottom
R171 "R-1206R" R-1206R 1192.91,787.4 r0 top
R172 "R-1206R" R-1206R 1192.91,595.47 r0 top
R173 "R-1206R" R-1206R 1192.91,500 r0 top
R174 "R-1206R" R-1206R 1192.91,690.94 r0 top
R175 "R-1206R" R-1206R 610.24,499.02 r180 top
R176 "R-1206R" R-1206R 610.24,595.47 r180 top
R177 "R-1206R" R-1206R 610.24,691.93 r180 top
R178 "R-1206R" R-1206R 610.24,787.4 r180 top
R179 "R-0402R" R-0402R 1703.74,1442.91 r0 top
R180 "R-0402R" R-0402R 1703.74,1389.76 r0 top
R181 "R-0402R" R-0402R 1703.74,1318.9 r0 top
R182 "R-0402R" R-0402R 1703.74,1265.75 r0 top
R183 "R-0402R" R-0402R 1728.35,1150.59 r270 top
R184 "R-0402R" R-0402R 1728.35,1062.01 r90 top
R185 "R-0402R" R-0402R 912.4,1095.47 r0 top
R186 "R-1206R" R-1206R 752.95,1282.48 r180 bottom
R187 "R-1206R" R-1206R 752.95,1378.94 r180 bottom
R188 "R-0402R" R-0402R 1024.61,1095.47 r0 bottom
R189 "R-0402R" R-0402R 912.4,1044.29 r0 top
R190 "R-1206R" R-1206R 752.95,1186.02 r180 bottom
R191 "R-1206R" R-1206R 752.95,1089.57 r180 bottom
R192 "R-0402R" R-0402R 1024.61,1044.29 r0 bottom
R193 "R-0402R" R-0402R 912.4,993.11 r0 top
R194 "R-1206R" R-1206R 752.95,896.65 r180 bottom
R195 "R-1206R" R-1206R 752.95,993.11 r180 bottom
R196 "R-0402R" R-0402R 1024.61,993.11 r0 bottom
R197 "R-0402R" R-0402R 912.4,941.93 r0 top
R198 "R-1206R" R-1206R 752.95,1038.39 r180 top
R199 "R-1206R" R-1206R 752.95,941.93 r180 top
R200 "R-0402R" R-0402R 1024.61,941.93 r0 bottom
R201 "R-0402R" R-0402R 1731.3,2688.98 r180 top
TP1 "PT-SINGLE-SIDE-0.45" PT-SINGLE-SIDE-0.45 2781.5,3188.98 r180 bottom
TP2 "PT-SINGLE-SIDE-0.45" PT-SINGLE-SIDE-0.45 2881.5,3188.98 r180 bottom
TP3 "PT-SINGLE-SIDE-0.45" PT-SINGLE-SIDE-0.45 2981.5,3188.98 r180 bottom
TP4 "PT-SINGLE-SIDE-0.45" PT-SINGLE-SIDE-0.45 3081.5,3188.98 r180 bottom
TP5 "PT-SINGLE-SIDE-0.45" PT-SINGLE-SIDE-0.45 3181.5,3188.98 r180 bottom
U1 "U-FBGA672-27X27MM-P1MM" U-FBGA672-27X27MM-P1MM 2413.39,1155.51 r270 top
U2 "U-SOT23-5R" U-SOT23-5R 1346.46,1079.72 r90 bottom
U3 "U-TI-TSSOP24-R" U-TI-TSSOP24-R 1579.72,1682.09 r180 top
U4 "U-MICRON-T-PBGA-24B05-6X8X1.2MM-P1MM" U-MICRON-T-PBGA-24B05-6X8X1.2MM-P1MM 1265.75,1560.04 r180 top
U5 "U-SO8R-A" U-SO8R-A 3740.16,2954.72 r90 bottom
U6 "U-LQFN24-4.5X4.5MM" U-LQFN24-4.5X4.5MM 4797.24,2942.91 r0 top
U7 "U-LQFN12-2X2MM" U-LQFN12-2X2MM 2313.98,2491.14 r180 bottom
U8 "U-LQFN12-2X2MM" U-LQFN12-2X2MM 3503.94,696.85 r90 bottom
U9 "U-LQFN12-2X2MM" U-LQFN12-2X2MM 2970.47,2491.14 r180 bottom
U10 "U-SO8R-A" U-SO8R-A 4274.61,2954.72 r90 bottom
U11 "U-VSSOP8-0.65MM" U-VSSOP8-0.65MM 3370.08,1468.5 r90 top
U12 "U-SOT23-5R" U-SOT23-5R 3419.29,1645.67 r180 top
U13 "U-SO8R-A" U-SO8R-A 3590.55,1112.2 r0 top
U14 "Q-SOT23-6R" Q-SOT23-6R 4209.65,1897.64 r180 top
U15 "U-TEXAS-TSSOP20-PWP-R" U-TEXAS-TSSOP20-PWP-R 4086.61,870.08 r90 top
U16 "U-SC70-6-R" U-SC70-6-R 3909.45,1188.98 r180 top
U17 "U-TI-SOT23-5R" U-TI-SOT23-5R 4281.5,1116.14 r90 top
U18 "U-TI-SOT23-5R" U-TI-SOT23-5R 4281.5,1358.27 r90 top
U19 "Y-MICROSEMI-QUANTUM-SA_45S-CSAC" Y-MICROSEMI-QUANTUM-SA_45S-CSAC 5444.88,1307.48 r90 top
U20 "U-NXP-VSSOP8-0_5MM" U-NXP-VSSOP8-0_5MM 3242.13,1096.46 r0 top
U21 "U-TI-SOT23-5R" U-TI-SOT23-5R 1219.49,1948.82 r180 top
U22 "U-FTDI-QFN76-9X9MM-P0.4MM" U-FTDI-QFN76-9X9MM-P0.4MM 730.32,2651.57 r90 top
U23 "U-SO8R-A" U-SO8R-A 469.49,3073.82 r90 top
U24 "Q-SOT23-6R" Q-SOT23-6R 253.94,2596.46 r90 top
U25 "U-TI-WQFN14-P0.5MMA" U-TI-WQFN14-P0.5MMA 610.24,2306.1 r270 top
U26 "U-TI-SOT23-5R" U-TI-SOT23-5R 850.39,2344.49 r270 top
U28 "J-SAMTEC-PCI_EXPRESS-064" J-SAMTEC-PCI_EXPRESS-064 2250,-39.37 r0 top
U29 "Q-SOT23-6RA" Q-SOT23-6RA 500.98,2052.17 r90 top
U30 "U-SC70-6-RA" U-SC70-6-RA 390.75,1470.47 r180 top
U31 "U-TI-WQFN14-P0.5MM" U-TI-WQFN14-P0.5MM 2500.98,1899.61 r90 top
U32 "U-FAIRCHILD-TSSOP20-R" U-FAIRCHILD-TSSOP20-R 902.56,656.5 r270 bottom
U33 "U-TI-WQFN14-P0.5MM" U-TI-WQFN14-P0.5MM 1685.04,1354.33 r180 bottom
U34 "U-FAIRCHILD-TSSOP20-R" U-FAIRCHILD-TSSOP20-R 902.56,656.5 r270 top
U35 "U-TI-WQFN14-P0.5MM" U-TI-WQFN14-P0.5MM 1685.04,1075.79 r180 bottom
U36 "U-MAXIM-TDFN8R-3X3MM" U-MAXIM-TDFN8R-3X3MM 657.48,2034.45 r90 bottom
U37 "U-MAXIM-TDFN8R-3X3MM" U-MAXIM-TDFN8R-3X3MM 474.41,2163.39 r90 bottom
U38 "U-MAXIM-TDFN8R-3X3MM" U-MAXIM-TDFN8R-3X3MM 786.42,1606.3 r90 bottom
U39 "U-MAXIM-TDFN8R-3X3MM" U-MAXIM-TDFN8R-3X3MM 469.49,1657.48 r90 bottom
U40 "U-MAXIM-TDFN8R-3X3MM" U-MAXIM-TDFN8R-3X3MM 527.56,1233.27 r180 bottom
U41 "U-TEXAS-TSSOP20-PWP-R" U-TEXAS-TSSOP20-PWP-R 1129.92,1005.91 r270 top
U42 "U-MAXIM-TDFN8R-3X3MM" U-MAXIM-TDFN8R-3X3MM 387.8,880.91 r180 bottom
VR1 "D-DIODES_INC-SMCJ-R" D-DIODES_INC-SMCJ-R 5468.5,2645.67 r180 top
VR2 "D-SOD323-R" D-SOD323-R 759.84,2161.42 r180 top
VR3 "D-SOD323-R" D-SOD323-R 660.43,2150.59 r0 bottom
VR4 "D-SOD323-R" D-SOD323-R 604.33,1601.38 r270 bottom
VR5 "D-SOD323-R" D-SOD323-R 440.94,1074.8 r270 bottom
VR6 "D-SOD323-R" D-SOD323-R 187.01,901.57 r180 bottom
Y1 "Y-SITIME-2X1_6MM" Y-SITIME-2X1_6MM 1601.38,612.2 r0 top
Y2 "Y-SI510-3.2X5-4PINS" Y-SI510-3.2X5-4PINS 1590.55,786.42 r0 top
Y3 "Y-KYOCERA-CX3225SB" Y-KYOCERA-CX3225SB 1109.25,2727.36 r180 top

## Footprints (in the part's own frame and the unit in brackets; to place one, negate y for a bottom-side part, rotate by r counter-clockwise, add the part's x,y. Pads: shape width x height; smd on the part's side, far side on the other; paste and mask are expansions set on the pad)
C-0402R [mm]
  rect 0.65x0.6 smd paste-0.05 mask+0.05: 1(-0.475,0) 2(0.475,0)
  silkscreen extent -0.7,-0.6 0.7,0.6
C-0805R [mm]
  rect 1x1.35 smd paste-0.05 mask+0.05: 1(-1,0) 2(1,0)
  silkscreen extent -1.75,-1 1.75,1
C-1206R [mm]
  rect 1.2x1.85 smd paste-0.05 mask+0.05: 1(-1.425,0) 2(1.425,0)
  silkscreen extent -2.25,-1.15 2.25,1.15
CC1210 [mm]
  rect 1.3x2.85 smd paste-0.05 mask+0.05: 1(-1.475,0) 2(1.475,0)
  silkscreen extent -2.4,-1.7 2.4,1.7
D-DIODES_INC-SMCJ-R [mm]
  rect 2.5x3.3 smd paste-0.05 mask+0.05: 1(3.45,0) 2(-3.45,0)
  silkscreen extent -3.55,-3.11 3.55,3.11
D-SMB-R [mm]
  rect 1.52x2.3 smd paste-0.05 mask+0.1: 1(2.135,0) 2(-2.135,0)
  silkscreen extent -2.3,-2 2.3,2
D-SOD323-R [mm]
  rect 0.8x0.7 smd paste-0.05 mask+0.05: 1(-1.1,0) 2(1.1,0)
  silkscreen extent -1.75,-0.8 1.75,0.8
D-SOD323-RA [mm]
  rect 0.8x0.7 smd paste-0.05 mask+0.05: 1(-1.1,0) 2(1.1,0)
  silkscreen extent -1.75,-0.8 1.75,0.8
D-SOD323-RB [mm]
  rect 0.8x0.7 smd paste-0.05 mask+0.05: 1(-1.1,0) 2(1.1,0)
  silkscreen extent -1.75,-0.8 1.75,0.8
D-SOT23R [mm]
  rrect0% 1x1 smd paste-0.05 mask+0.05: 1(-1,-1) 2(1,-1)
  rect 1.05x0.9 smd paste-0.05 mask+0.05: 3(0,0.95)
  silkscreen extent -1.55,-0.71 1.55,0.71
D-SOT143-R [mm]
  rect 1.5x0.8 smd paste-0.05 mask+0.05: 1(-0.85,-1.05)
  rect 1x0.8 smd paste-0.05 mask+0.05: 2(0.95,-1.05) 3(0.95,1.05) 4(-0.95,1.05)
  silkscreen extent -2,-1.8 1.8,1.8
DL-KINGBRIGHT-APHD1608LZGCK [mm]
  rect 0.7x0.8 smd paste-0.05 mask+0.05: 1(0.75,0) 2(-0.75,0)
  silkscreen extent 0.9,-0.67 1.33,0.67
DL-KINGBRIGHT-APTD1608LSURCK [mm]
  rect 0.8x0.8 smd paste-0.05 mask+0.05: 1(0.825,0) 2(-0.825,0)
  silkscreen extent 0.9,-0.65 1.45,0.65
J-CINCH-142-0701-551-SMA [mm]
  round 2.2 / inner round 2.25 / far side round 2.2 hole 1.65 mask+0.1: 1(0,0)
  round 2.5 / inner round 2.35 / far side round 2.5 hole 1.8 mask+0.1: 2(-2.54,-2.54) 3(-2.54,2.54) 4(2.54,2.54) 5(2.54,-2.54)
  silkscreen extent -6,-3.17 3.17,3.17
J-MOLEX-45586-0005 [mm]
  rect 2.45x2.45 / inner rect 2.6x2.6 / far side rect 2.95x2.95 hole 1.95 mask+0.1: 1(-6.3,0)
  round 2.45 / inner round 2.6 / far side round 2.95 hole 1.95 mask+0.1: 2(-2.1,0) 3(2.1,0) 4(6.3,0) 5(-6.3,-4.2) 6(-2.1,-4.2) 7(2.1,-4.2) 8(6.3,-4.2)
  round 0 hole 3 unplated: 9(-6.3,7.3) 10(6.3,7.3)
  silkscreen extent -9.53,1.1 9.13,14.28
J-MOLEX-USB-C-2169890001 [mm]
  round 0.6 / inner round 0.7 / far side round 0.65 hole 0.4 mask+0.075: A1(-0.39,-2.45) A4(-0.39,-1.55) A5(-0.39,-0.65) A6(-0.39,0.25) A7(-0.39,1.15) A9(-0.39,2.05) A12(-0.39,2.95) B1(0.39,2.5) B4(0.39,1.6) B5(0.39,0.7) B6(0.39,-0.2) B7(0.39,-1.1) B9(0.39,-2) B12(0.39,-2.9)
  oval 0.9x1.9 / inner oval 1x2 / far side oval 0.9x1.9 hole 0.6 slot 1.6 at 90 deg mask+0.075: C1(-1.43,-2.4) C2(-1.43,2.4) C3(1.43,2.4) C4(1.43,-2.4)
  silkscreen extent -1.98,-10.6 1.98,4.15
J-SAMTEC-ERF5-050-05.0-L-DVA [mm]
  rect 0.3x1.5 smd mask+0.05: 1(12.25,1.975) 2(12.25,-1.975) 3(11.75,1.975) 4(11.75,-1.975) 5(11.25,1.975) 6(11.25,-1.975) 7(10.75,1.975) 8(10.75,-1.975) 9(10.25,1.975) 10(10.25,-1.975) 11(9.75,1.975) 12(9.75,-1.975) 13(9.25,1.975) 14(9.25,-1.975) 15(8.75,1.975) 16(8.75,-1.975) 17(8.25,1.975) 18(8.25,-1.975) 19(7.75,1.975) 20(7.75,-1.975) 21(7.25,1.975) 22(7.25,-1.975) 23(6.75,1.975) 24(6.75,-1.975) 25(6.25,1.975) 26(6.25,-1.975) 27(5.75,1.975) 28(5.75,-1.975) 29(5.25,1.975) 30(5.25,-1.975) 31(4.75,1.975) 32(4.75,-1.975) 33(4.25,1.975) 34(4.25,-1.975) 35(3.75,1.975) 36(3.75,-1.975) 37(3.25,1.975) 38(3.25,-1.975) 39(2.75,1.975) 40(2.75,-1.975) 41(2.25,1.975) 42(2.25,-1.975) 43(1.75,1.975) 44(1.75,-1.975) 45(1.25,1.975) 46(1.25,-1.975) 47(0.75,1.975) 48(0.75,-1.975) 49(0.25,1.975) 50(0.25,-1.975) 51(-0.25,1.975) 52(-0.25,-1.975) 53(-0.75,1.975) 54(-0.75,-1.975) 55(-1.25,1.975) 56(-1.25,-1.975) 57(-1.75,1.975) 58(-1.75,-1.975) 59(-2.25,1.975) 60(-2.25,-1.975) 61(-2.75,1.975) 62(-2.75,-1.975) 63(-3.25,1.975) 64(-3.25,-1.975) 65(-3.75,1.975) 66(-3.75,-1.975) 67(-4.25,1.975) 68(-4.25,-1.975) 69(-4.75,1.975) 70(-4.75,-1.975) 71(-5.25,1.975) 72(-5.25,-1.975) 73(-5.75,1.975) 74(-5.75,-1.975) 75(-6.25,1.975) 76(-6.25,-1.975) 77(-6.75,1.975) 78(-6.75,-1.975) 79(-7.25,1.975) 80(-7.25,-1.975) 81(-7.75,1.975) 82(-7.75,-1.975) 83(-8.25,1.975) 84(-8.25,-1.975) 85(-8.75,1.975) 86(-8.75,-1.975) 87(-9.25,1.975) 88(-9.25,-1.975) 89(-9.75,1.975) 90(-9.75,-1.975) 91(-10.25,1.975) 92(-10.25,-1.975) 93(-10.75,1.975) 94(-10.75,-1.975) 95(-11.25,1.975) 96(-11.25,-1.975) 97(-11.75,1.975) 98(-11.75,-1.975) 99(-12.25,1.975) 100(-12.25,-1.975)
  round 0 hole 1.45 unplated: 101(-14.4,1.4) 102(14.4,1.4)
  silkscreen extent -15.9,-2.47 15.9,2.47
J-SAMTEC-PCI_EXPRESS-064 [mm]
  rect 0.7x3.2 smd far side mask+0.55: A1(-11.5,0.5)
  rect 0.7x4.2 smd far side mask+0.05: A2(-10.5,0) A3(-9.5,0) A4(-8.5,0) A5(-7.5,0) A6(-6.5,0) A7(-5.5,0) A8(-4.5,0) A9(-3.5,0) A10(-2.5,0) A11(-1.5,0) A12(1.5,0) A13(2.5,0) A14(3.5,0) A15(4.5,0) A16(5.5,0) A17(6.5,0) A18(7.5,0) A19(8.5,0) A20(9.5,0) A21(10.5,0) A22(11.5,0) A23(12.5,0) A24(13.5,0) A25(14.5,0) A26(15.5,0) A27(16.5,0) A28(17.5,0) A29(18.5,0) A30(19.5,0) A31(20.5,0) A32(21.5,0)
  rect 0.7x4.2 smd mask+0.05: B1(-11.5,0) B2(-10.5,0) B3(-9.5,0) B4(-8.5,0) B5(-7.5,0) B6(-6.5,0) B7(-5.5,0) B8(-4.5,0) B9(-3.5,0) B10(-2.5,0) B11(-1.5,0) B12(1.5,0) B13(2.5,0) B14(3.5,0) B15(4.5,0) B16(5.5,0) B17(6.5,0) B18(7.5,0) B19(8.5,0) B20(9.5,0) B21(10.5,0) B22(11.5,0) B23(12.5,0) B24(13.5,0) B25(14.5,0) B26(15.5,0) B27(16.5,0) B28(17.5,0) B29(18.5,0) B30(19.5,0) B32(21.5,0)
  rect 0.7x3.2 smd mask+0.55: B31(20.5,0.5)
J-SAMTEC-SQW-105-01-F-D-VS [mm]
  rect 1.016x2.24 smd mask+0.05: 1(4,-1.635) 2(4,1.635) 3(2,-1.635) 4(2,1.635) 5(0,-1.635) 6(0,1.635) 7(-2,-1.635) 8(-2,1.635) 9(-4,-1.635) 10(-4,1.635)
  silkscreen extent -5.15,-2 5.15,2
J-SAMTEC-TSM-102-01-F-SH [mm]
  rect 1.27x3.18 smd paste-0.05 mask+0.05: 1(-1.27,0) 2(1.27,0)
  silkscreen extent -2.54,2.1 2.54,12.39
J-TSM-105-02-DV [mm]
  rect 1.3x3.2 smd paste-0.05 mask+0.05: 1(-5.08,-2.75) 2(-5.08,2.75) 3(-2.54,-2.75) 4(-2.54,2.75) 5(0,-2.75) 6(0,2.75) 7(2.54,-2.75) 8(2.54,2.75) 9(5.08,-2.75) 10(5.08,2.75)
  silkscreen extent -6.35,-2.54 6.35,2.54
L-0805CS-R [mm]
  rect 1.02x1.78 smd paste-0.05 mask+0.05: 1(-0.89,0) 2(0.89,0)
  silkscreen extent -1.65,-1.15 1.65,1.15
L-BLM18-R [mm]
  rect 0.7x0.7 smd paste-0.05 mask+0.05: 1(-0.65,0) 2(0.65,0)
  silkscreen extent -1.3,-0.6 1.3,0.6
L-BOURNS-SRU8043 [mm]
  rect 3.2x2 smd paste-0.05 mask+0.05: 1(0,3.9) 2(0,-3.9)
  silkscreen extent -4.15,-4.15 4.15,4.3
L-COILCRAFT-1812CS [mm]
  rect 1.14x3.05 smd paste-0.05 mask+0.05: 1(-2.07,0) 2(2.07,0)
  silkscreen extent -2.47,-1.91 2.47,1.91
L-FAIR-RITE-2512061217Y5 [mm]
  rect 1.6x1.8 smd paste-0.05 mask+0.05: 1(-1.4,0) 2(1.4,0)
  silkscreen extent -0.3,-0.65 0.3,0.65
L-IHLP-1212BZ-11 [mm]
  rect 1.2x1.5 smd paste-0.05 mask+0.05: 1(0,1.35) 2(0,-1.35)
  silkscreen extent -1.6,-1.6 1.6,1.6
L-LAIRD-LI0402D121R-10 [mm]
  rect 0.8x0.55 smd paste-0.05 mask+0.05: 1(-0.65,0) 2(0.65,0)
  silkscreen extent -0.9,-0.55 0.9,0.55
L-PULSE-PA4341.XXXNLT [mm]
  rect 3.5x2.95 smd paste-0.05 mask+0.05: 1(0,2.725) 2(0,-2.725)
  silkscreen extent -3.45,-3.45 3.45,3.45
L-VISHAY-IHLP-2020CZ-01 [mm]
  rect 2.79x1.905 smd paste-0.05 mask+0.05: 1(0,2.425) 2(0,-2.425)
  silkscreen extent -2.72,-2.72 2.72,2.72
M-WE-WA-SMST-M3-9774080360R [mm]
  round 7.4 smd mask+0.1: 1(0,0)